# Altium PCB ee453_pcb_Schulz.PcbDoc (part 1 of 2)
Units mil, origin at the board's own origin, x right, y up, seen from the top; angles counter-clockwise.
Board outline 6000 x 5000 mil, 4 copper layers (Top Layer, PWR, GND, Bottom Layer); 112 components, 58 nets, 388 pads, 33 vias.
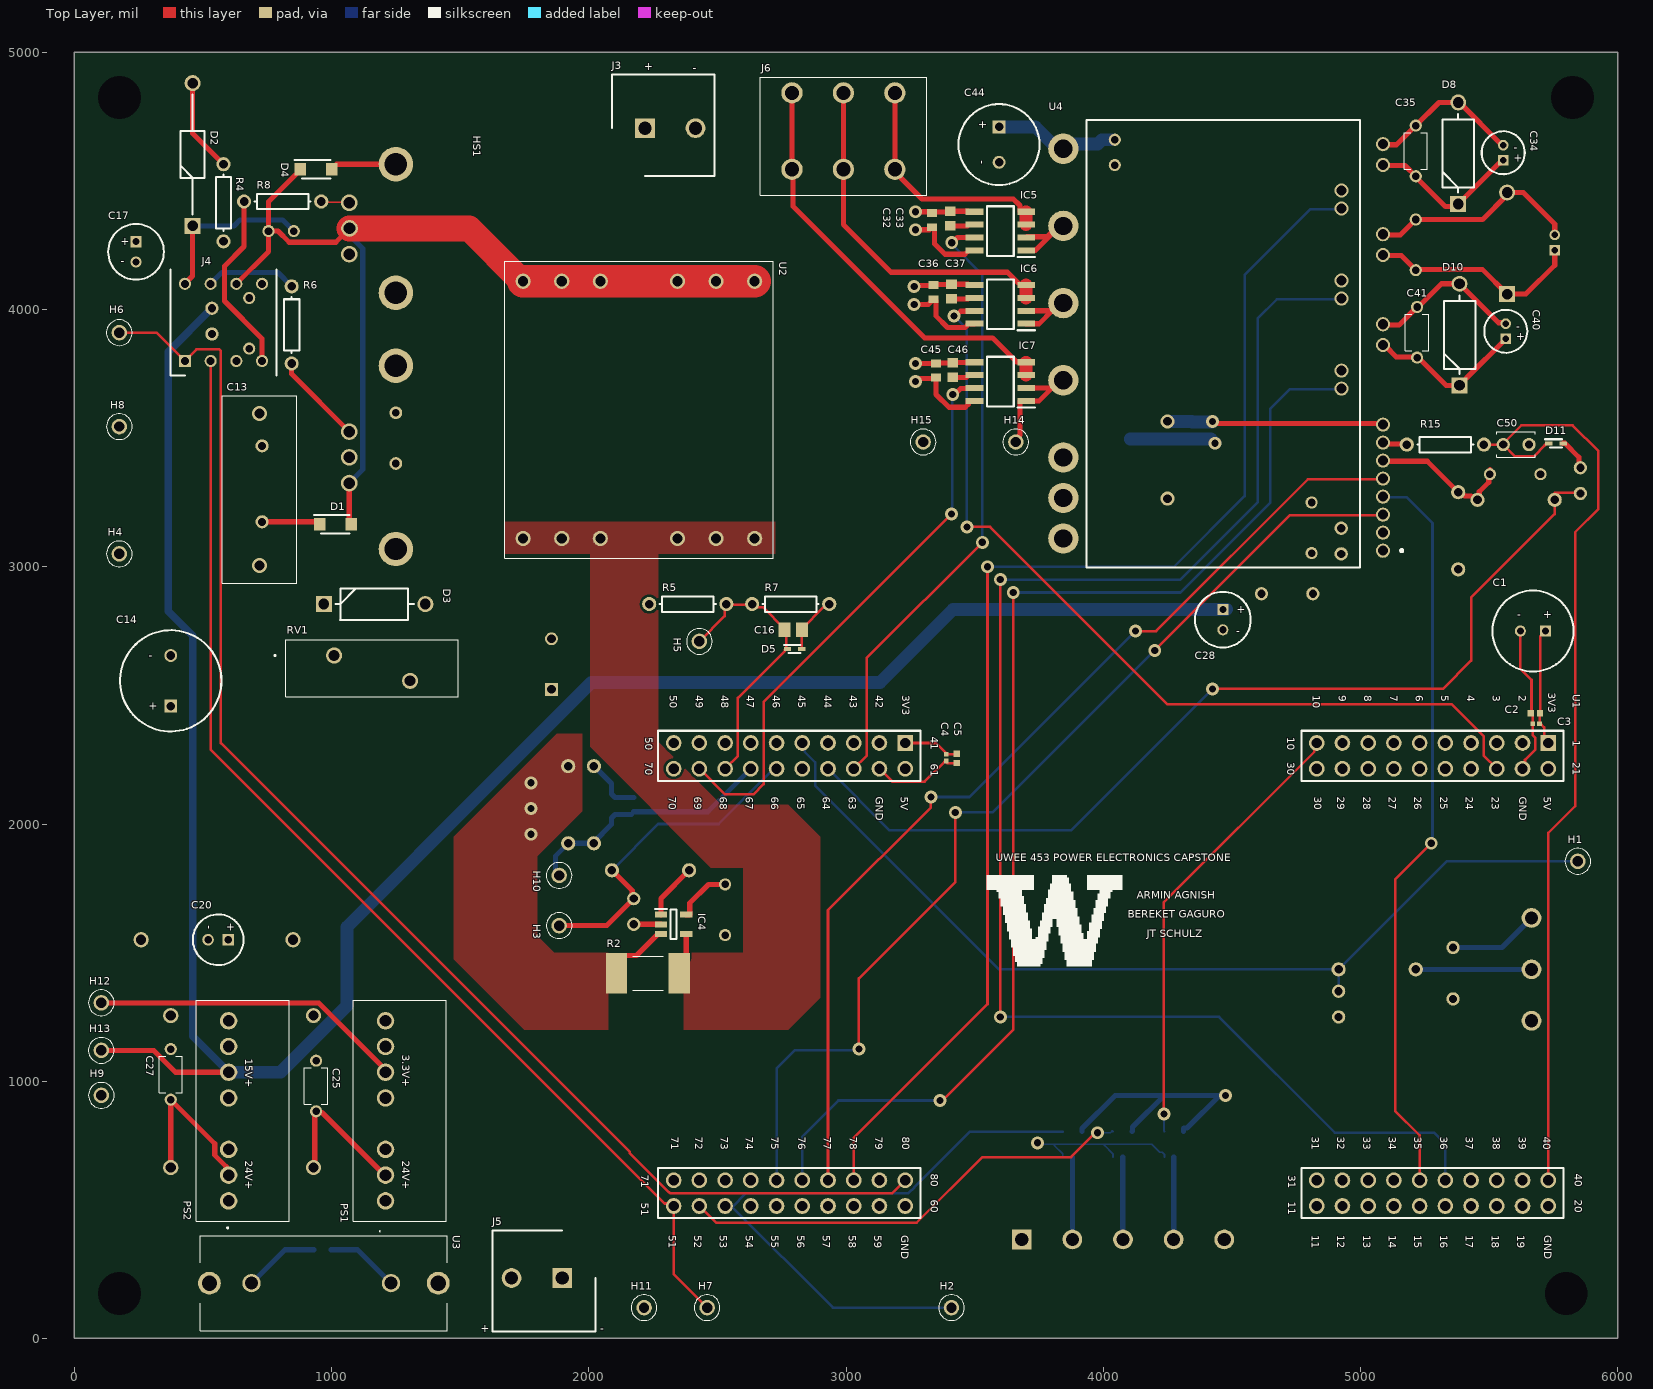
[diagram p0: Top Layer view]
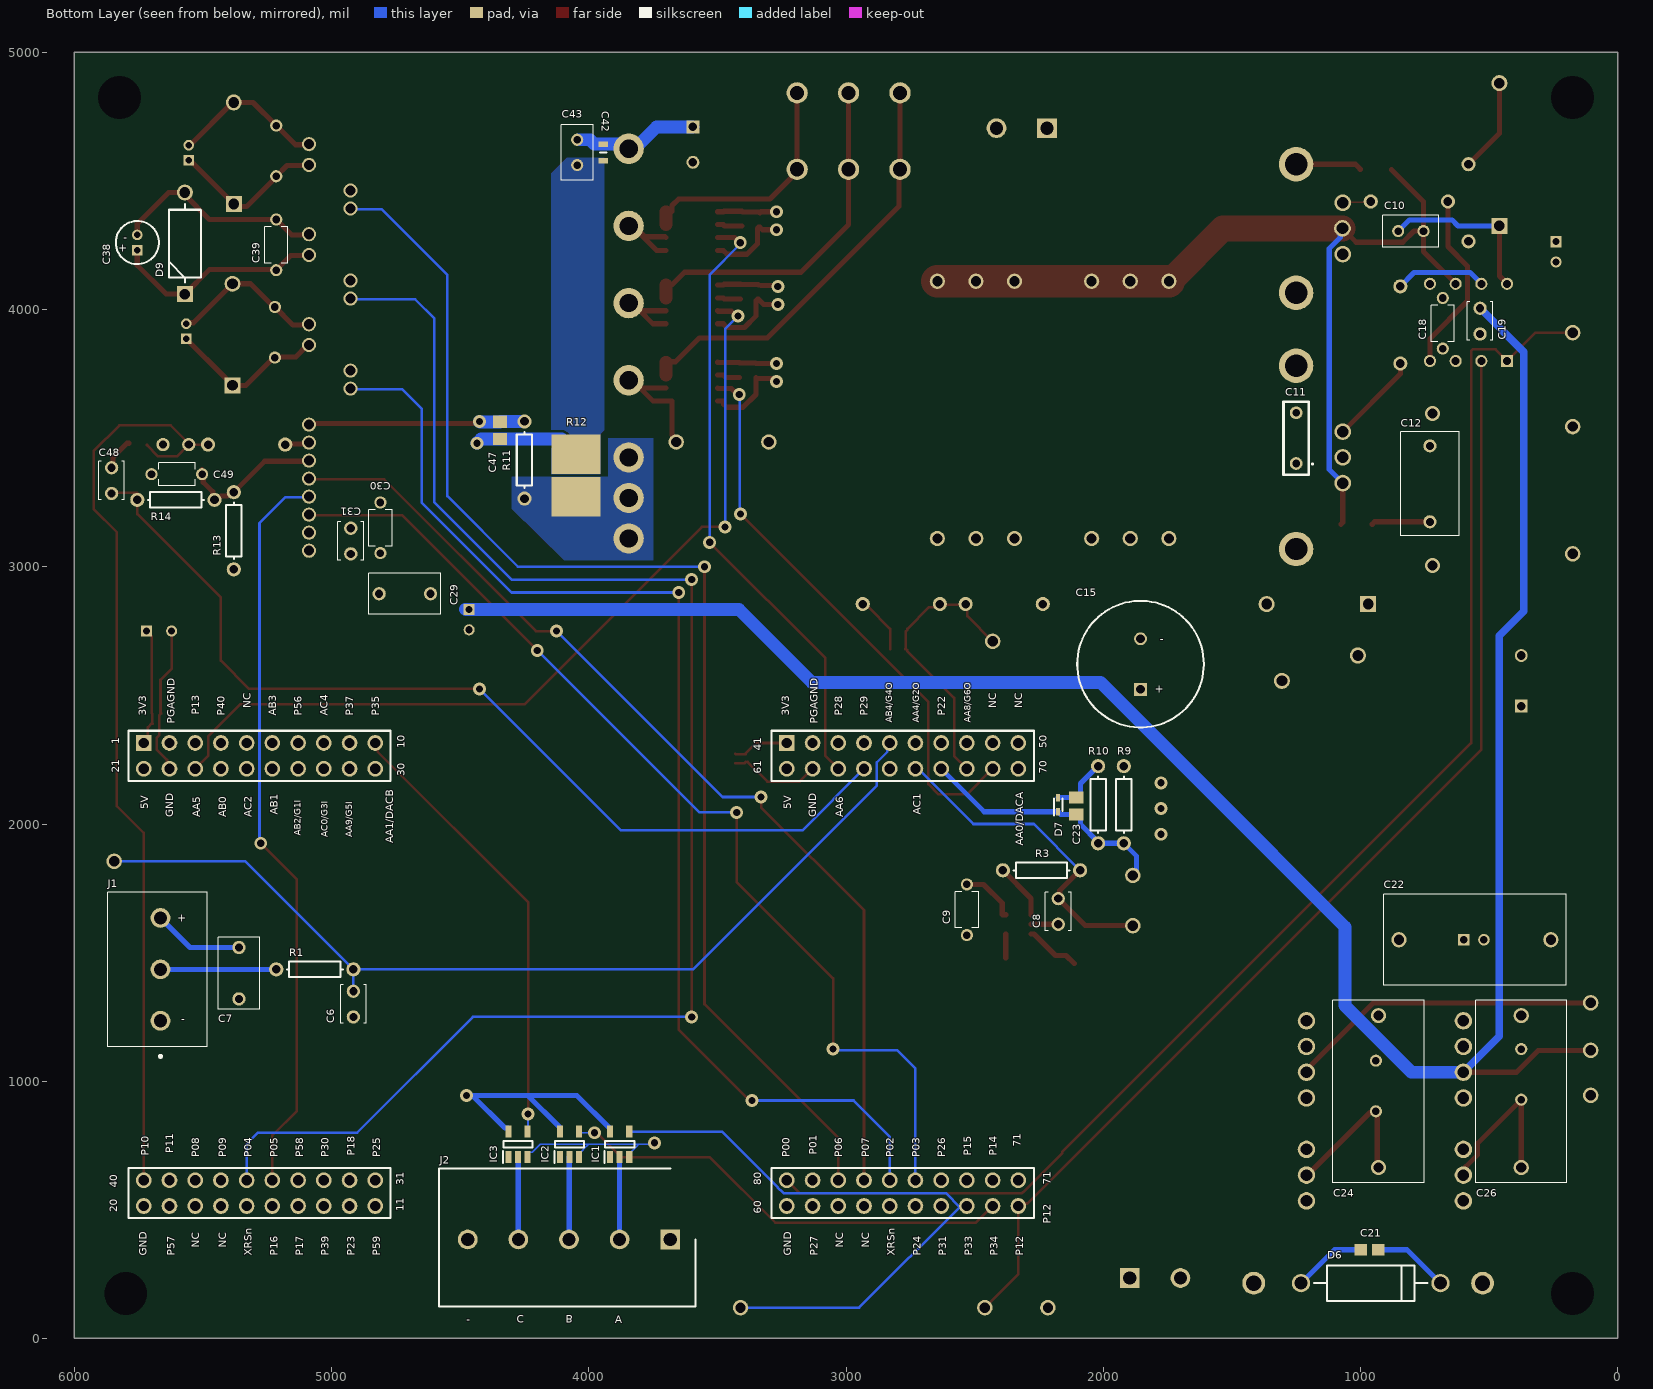
[diagram p1: Bottom Layer view, seen from below]
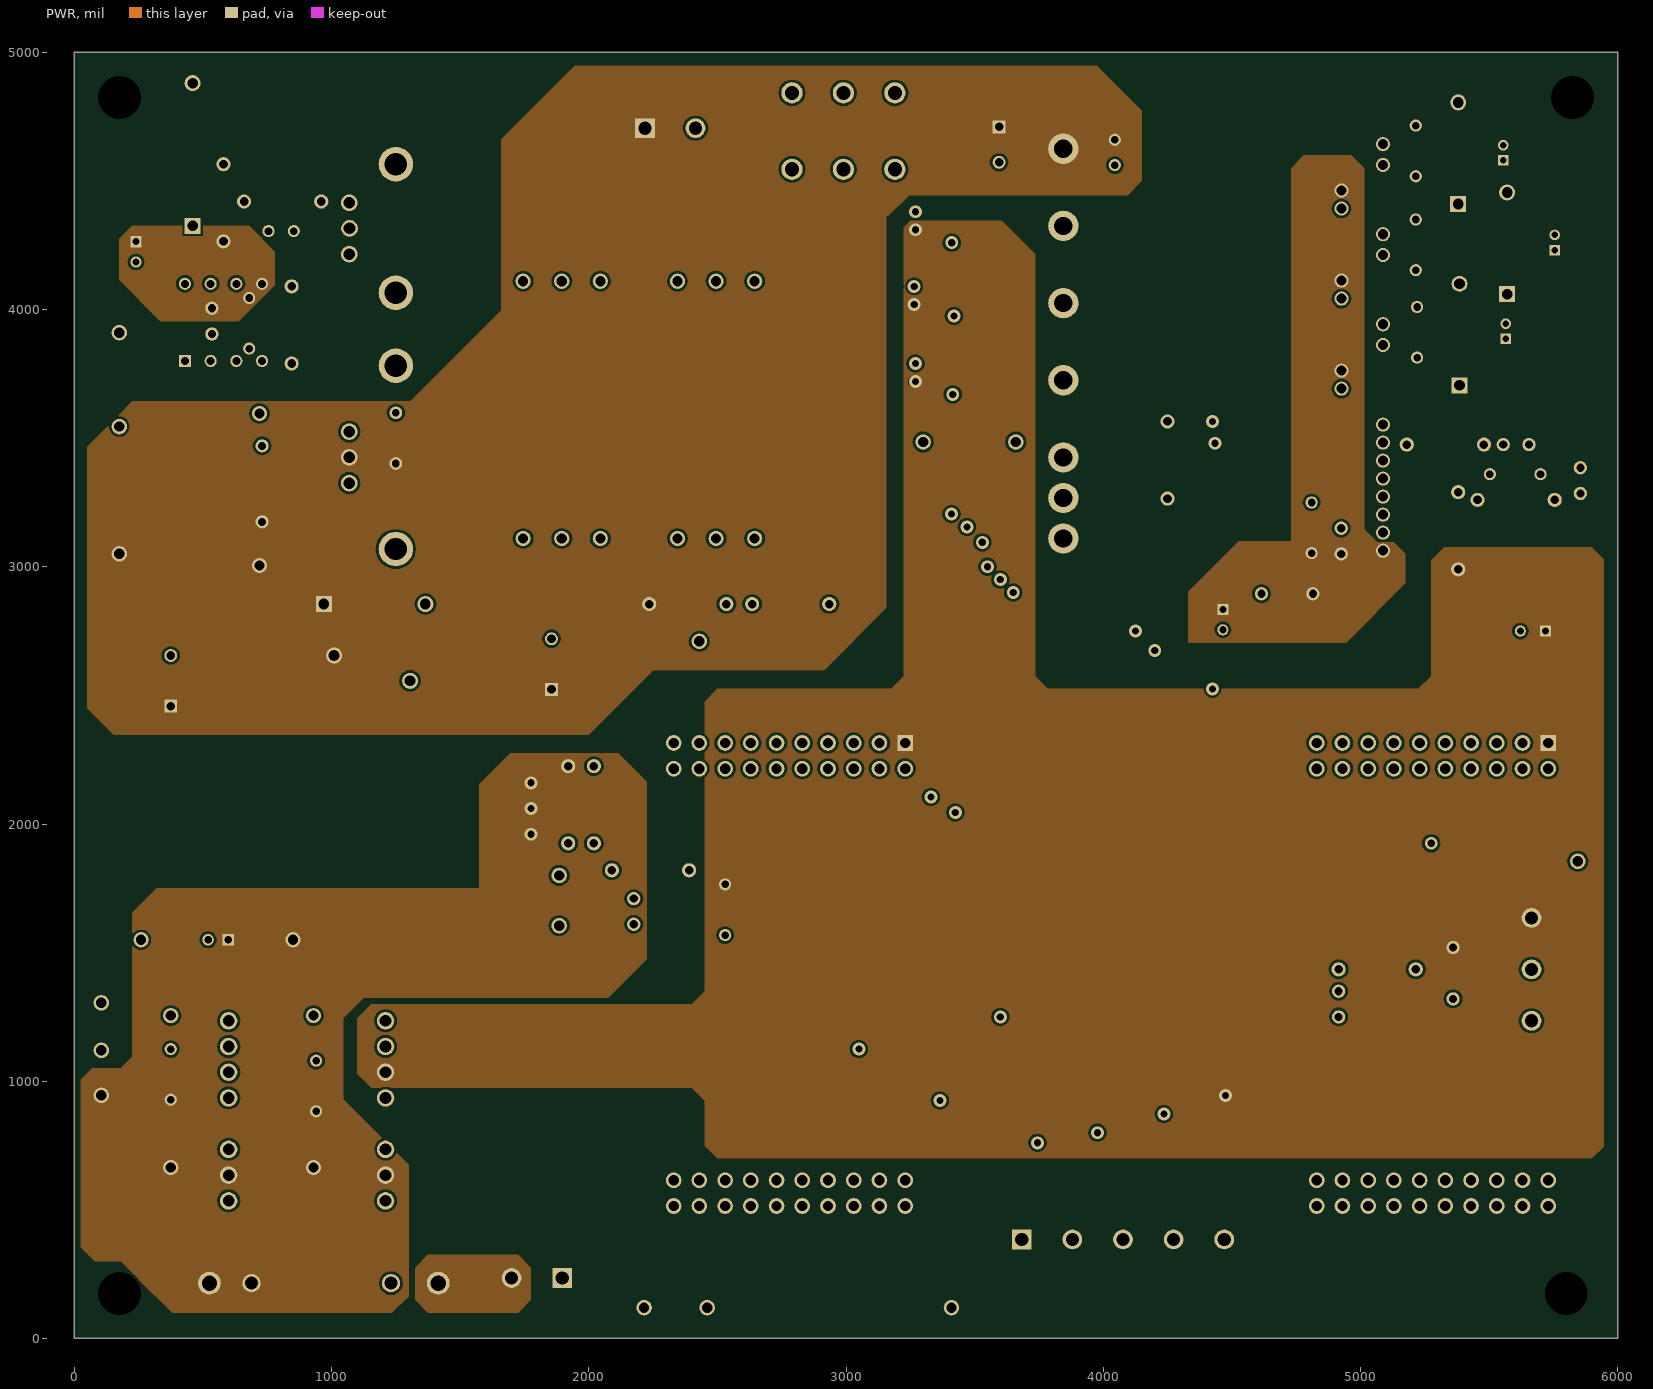
[diagram p2: PWR]
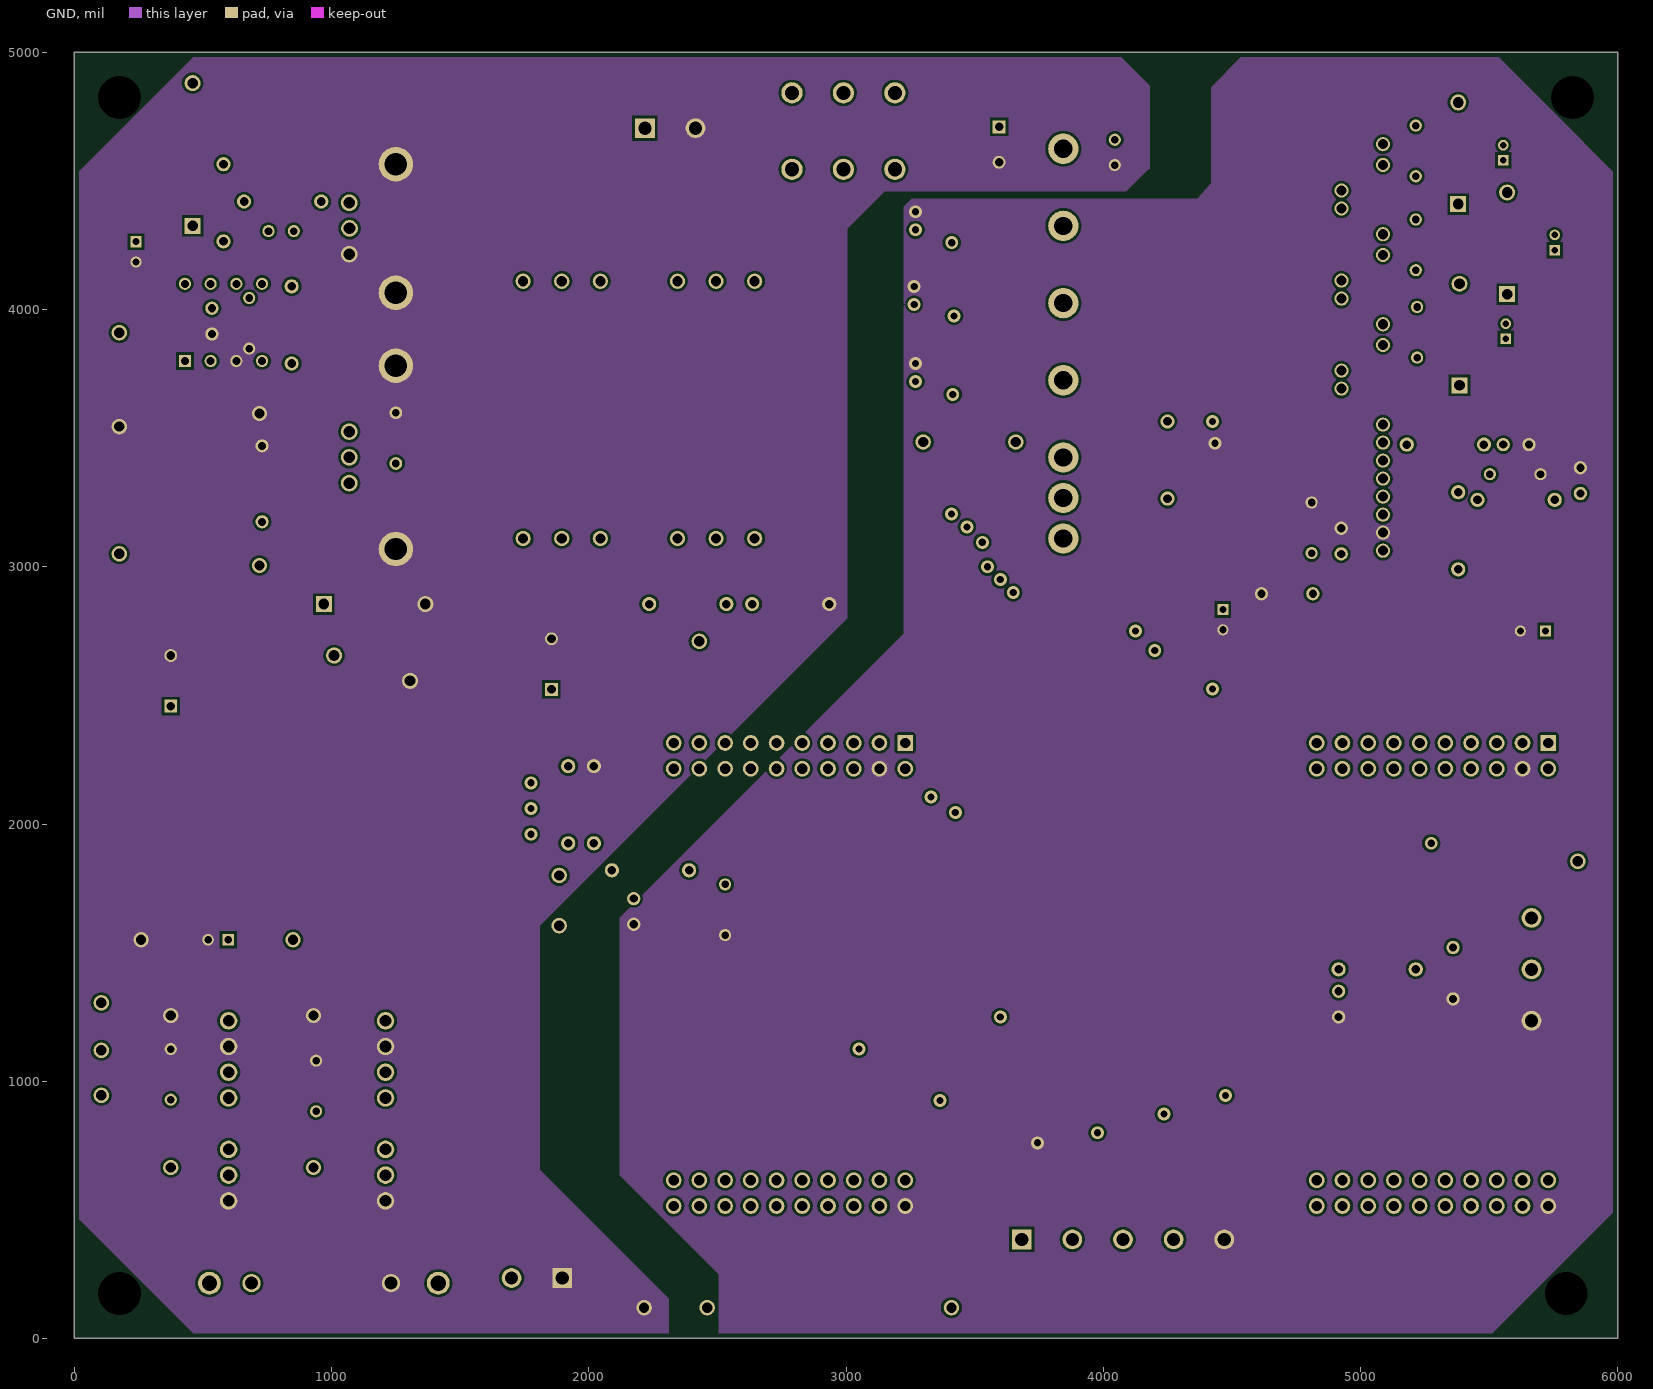
[diagram p3: GND]

## Layer stack, top to bottom
Top Solder: solder mask 0.4, Solder Resist, Dk 3.5
Top Layer: signal copper 1.4
Dielectric 1: dielectric 12.6, FR-4, Dk 4.8
PWR: signal copper 1.4
Dielectric 2: dielectric 12.6, FR-4, Dk 4.8
GND: signal copper 1.4
Dielectric 3: dielectric 12.6, FR-4, Dk 4.8
Bottom Layer: signal copper 1.4
Bottom Solder: solder mask 0.4, Solder Resist, Dk 3.5

## Board outline
0,0 6000,0 6000,5000 0,5000

## Design rules (kind name [scope] priority, off if disabled: settings)
Clearance [All] p1: gap=10 ignorepadtopadclearanceinfootprint=TRUE
Height [All] p1: minheight=0 maxheight=2000 prefheight=500
HoleSize [All] p1: absolutevalues=TRUE maxlimit=250 minlimit=5 maxpercent=80.000 minpercent=20.000
MinimumAnnularRing [All] p1: minimumring=5
PlaneConnect [All] p1: planeconnectstyle=Direct reliefexpansion=20 reliefentries=4 reliefconductorwidth=10 reliefairgap=10
PolygonConnect [All] p1: connectstyle=Direct reliefconductorwidth=10 reliefentries=4 polygonreliefangle="90 Angle" airgapwidth=10
RoutingVias [All] p1: holewidth=28 width=50 viastyle="Through Hole" minholewidth=28 minwidth=50 maxholewidth=28 maxwidth=50
SolderMaskExpansion [All] p1: expansion=4 istentingtop=FALSE
Width [All] p1: maxlimit=500 minlimit=7 preferedwidth=7
27 further rules are at their usual default settings.

## Classes and differential pairs
component class Power_Stage: C20 C21 C22 C23 C24 C25 C26 C27 D6 D7 H9 H10 H11 H12 H13 J5 PS1 PS2 R9 R10 U3
component class Drive_Module: C28 C29 C30 C31 C32 C33 C34 C35 C36 C37 C38 C39 C40 C41 C42 C43 C44 C45 C46 C47 C48 C49 C50 D8 D9 D10 D11 H14 IC5 IC6 IC7 J6 R11 R12 R13 R14 R15 U4
component class Boost_Stage: C8 C9 C10 C11 C12 C13 C14 C15 C16 C17 C18 C19 D1 D2 D3 D4 D5 H3 H4 H5 H6 H7 H8 HS1 IC4 J3 J4 R2 R3 R4 R5 R6 R7 R8 RV1 U2

## Components (designator, comment, footprint, x,y, rotation, side; value= is the part's Value field where it differs from the comment)
C1 "ECE-A1AKA220I" CAPPRD250W50D800H800 5720,2750 r180 top value=22uF
C2 "CC0402KRX7R6BB104" CAPC1005X55N 5680,2430.16 r180 top value=0.1uF
C3 "GRM033R71A103KA01D" CAPC0603X33N 5682.99,2390.16 r180 top value=0.01uF
C4 "GRM033R71A103KA01D" CAPC0603X33N 3390,2257.99 r270 top value=0.01uF
C5 "CC0402KRX7R6BB104" CAPC1005X55N 3430,2255 r270 top value=0.1uF
C6 "C315C103K5R5TA7990" C315C103K5R5TA7990 4915,1350 r270 bottom value=0.01uF
C7 "C330C105K5R5TA" C330C105K5R5TA 5360,1420 r270 bottom value=1uF
C8 "C315C103K5R5TA7990" C315C103K5R5TA7990 2175,1710 r270 bottom value=0.01uF
C9 "K104K10X7RF5UH5" K104K10X7RF5UH5 2530,1765 r270 bottom value=0.1uF
C10 "RDER72A105K2M1H03A" RCE5C1H104J2A2H03B 853.43,4305 r180 bottom value=1uF
C11 "R82EC2100DQ50J" R82(7.2X2.5) 1250,3500 r90 bottom value=0.01uF
C12 "ECQ-E2104JF" ECQE2104JF 730,3174.72 r90 bottom value=0.1uF
C13 "ECQ-E2105KF" ECQE2105KF 720,3005 r90 top value=1uF
C14 "EEU-FR2A101" CAPPRD500W65D1000H2200 375,2458.15 r90 top value=100uF
C15 "EEU-FS2A221" CAPPRD500W65D1250H2700 1855,2523.15 r90 bottom value=220uF
C16 "1nF" CAPC2013X95X45NL10T25 2795,2755 r180 top
C17 "UPW1E220MDD" CAPPRD200W50D550H1250 240,4263.74 r270 top value=22uF
C18 "K104K10X7RF5UH5" K104K10X7RF5UH5 680,4045 r270 bottom value=0.1uF
C19 "C315C103K5R5TA7990" C315C103K5R5TA7990 535,4005 r270 bottom value=0.01uF
C20 "27uF" CAPPRD200W55D500H1250 598.74,1550 r180 top
C21 "VC060326A580RP" CAPC1608X90X35ML15T15 965,345 r180 bottom
C22 "10uF" MKS4B051004J00KSSD 850.55,1550 r180 bottom
C23 "1nF" CAPC2013X95X45NL10T25 2105,2070 r270 bottom
C24 "MKS4B051004J00KSSD" MKS4B051004J00KSSD 930,664.45 r90 bottom value=10uF
C25 "K104K10X7RF5UH5" K104K10X7RF5UH5 940,883.15 r90 top value=0.1uF
C26 "MKS4B051004J00KSSD" MKS4B051004J00KSSD 375,664.45 r90 bottom value=10uF
C27 "K104K10X7RF5UH5" K104K10X7RF5UH5 375,928.15 r90 top value=0.1uF
C28 "UPW1E220MDD" CAPPRD200W50D550H1250 4465,2833.74 r270 top value=22uF
C29 "C330C105K5R5TA" C330C105K5R5TA 4715,2895 r180 bottom value=1uF
C30 "K104K10X7RF5UH5" K104K10X7RF5UH5 4810,3053.15 r90 bottom value=0.1uF
C31 "C315C103K5R5TA7990" C315C103K5R5TA7990 4925,3050 r90 bottom value=0.01uF
C32 "C0603C104K5RAC3121" CAPC1608X95N 3335,4347.56 r90 top value=0.1uF
C33 "GRM188R71H472KA01D" CAPC1608X90X35ML10T15 3405,4353.54 r90 top value=4.7nF
C34 "6.8uF" CAPPRD150W45D425H1250 5555,4580 r90 top
C35 "K104K10X7RF5UH5" K104K10X7RF5UH5 5215,4518.15 r90 top value=0.1uF
C36 "C0603C104K5RAC3121" CAPC1608X95N 3340,4067.56 r90 top value=0.1uF
C37 "GRM188R71H472KA01D" CAPC1608X90X35ML10T15 3410,4070 r90 top value=4.7nF
C38 "6.8uF" CAPPRD150W45D425H1250 5755,4230.94 r90 bottom
C39 "K104K10X7RF5UH5" K104K10X7RF5UH5 5215,4153.15 r90 bottom value=0.1uF
C40 "6.8uF" CAPPRD150W45D425H1250 5565,3885.94 r90 top
C41 "K104K10X7RF5UH5" K104K10X7RF5UH5 5220,3813.15 r90 top value=0.1uF
C42 "GRM188R72A104MA35D" CAPC1608X90N 3943.62,4610.79 r270 bottom value=0.1uF
C43 "RDER72A105K2M1H03A" RCE5C1H104J2A2H03B 4045,4660 r270 bottom value=1uF
C44 "EEU-FS2A470" CAPPRD350W65D800H1650 3595,4710 r270 top value=47uF
C45 "C0603C104K5RAC3121" CAPC1608X95N 3350,3762.56 r90 top value=0.1uF
C46 "GRM188R71H472KA01D" CAPC1608X90X35ML10T15 3415,3765 r90 top value=4.7nF
C47 "1nF" CAPC2013X95X45NL10T25 4345,3530 r270 bottom
C48 "C315C103K5R5TA7990" C315C103K5R5TA7990 5855,3285 r90 bottom value=0.01uF
C49 "K104K10X7RF5UH5" K104K10X7RF5UH5 5503.15,3360 r0 bottom value=0.1uF
C50 "C315C103K5R5TA7990" C315C103K5R5TA7990 5555,3475 r0 top value=0.01uF
D1 "S310FA" SODFL3618X143N 1015,3165 r0 top
D2 "1N4003" DIOAD1413W86L463D238 460,4325 r90 top
D3 "P6KE91A-E3_54" DIOAD1910W86L670D310 969.55,2855 r0 top
D4 "S310FA" SODFL3618X143N 940,4545 r0 top
D5 "BZX584C3V3-G3-08" SODFL1608X75N 2800,2680 r0 top
D6 "P6KE47A" ONSC-SURMETIC40-2-017AA-01 960,215 r0 bottom
D7 "BZX584C3V3-G3-08" SODFL1608X75N 2175,2075 r90 bottom
D8 "P6KE91A-E3_54" DIOAD1910W86L670D310 5380,4409.55 r90 top
D9 "P6KE91A-E3_54" DIOAD1910W86L670D310 5570,4059.55 r90 bottom
D10 "P6KE91A-E3_54" DIOAD1910W86L670D310 5385,3704.55 r90 top
D11 "BZX584C3V3-G3-08" SODFL1608X75N 5760,3480 r0 top
H1 "5003" 5003 5845,1855 r0 top
H2 "5003" 5003 3410,120 r0 top
H3 "5003" 5003 1885,1605 r270 top
H4 "5003" 5003 175,3050 r0 top
H5 "5003" 5003 2430,2710 r90 top
H6 "5003" 5003 175,3910 r90 top
H7 "5003" 5003 2460,120 r0 top
H8 "5003" 5003 175,3545 r0 top
H9 "5003" 5003 105,945 r0 top
H10 "5003" 5003 1885,1800 r0 top
H11 "5003" 5003 2215,120 r0 top
H12 "5003" 5003 105,1305 r0 top
H13 "5003" 5003 105,1120 r90 top
H14 "5003" 5003 3660,3485 r90 top
H15 "5003" 5003 3300,3485 r0 top
HS1 "Dual Heatsink" MOSFETsHeatsink 1250,3425.24 r0 top
IC1 "SN74LV1T34DBVRG4" SOT95P280X145-5N 3880,755 r90 bottom
IC2 "SN74LV1T34DBVRG4" SOT95P280X145-5N 4075,755 r90 bottom
IC3 "SN74LV1T34DBVRG4" SOT95P280X145-5N 4275,755 r90 bottom
IC4 "INA194AIDBVR" SOT95P280X145-5N 2330,1610 r0 top
IC5 "ACS725LLCTR-20AB-T" SOT127P600X175-8N 3600,4305 r180 top
IC6 "ACS725LLCTR-20AB-T" SOT127P600X175-8N 3600,4020 r180 top
IC7 "ACS725LLCTR-20AB-T" SOT127P600X175-8N 3600,3720 r180 top
J1 "1985917" 1985917 5665,1235 r90 bottom
J2 "1733606" SHDR5W110P0X500_1X5_2532X7360X1530P 3683.15,385 r0 bottom
J3 "1985881" SHDR2W110P0X500_1X2_1000X985X1390P 2218.15,4705 r0 top
J4 "DILB8P-223TLF" DIPS762W60P254L1016H525Q8N 430,3800 r90 top
J5 "1985881" SHDR2W110P0X500_1X2_1000X985X1390P 1896.85,235 r180 top
J6 "1730515" 1730515 2790,4545 r0 top
PS1 "RS3-243.3S" RS32433S 1210,535 r90 top
PS2 "RS3-2415S" RS32415S 600,535 r90 top
R1 "Res1" AXIAL-0.3 5065,1435 r0 bottom value=1.5K
R2 "5m" CRE2512FZR005E3 2230,1420 r0 top
R3 "Res1" AXIAL-0.3 2240,1820 r180 bottom value=1.5K
R4 "Res1" AXIAL-0.3 580,4415 r270 top value=10
R5 "Res1" AXIAL-0.3 2385,2855 r180 top value=80K
R6 "Res1" AXIAL-0.3 845,3940 r270 top value=10
R7 "Res1" AXIAL-0.3 2785,2855 r180 top value=5K
R8 "Res1" AXIAL-0.3 810,4420 r180 top value=10
R9 "Res1" AXIAL-0.3 1920,2075 r90 bottom value=50K
R10 "Res1" AXIAL-0.3 2020,2075 r270 bottom value=5K
R11 "Res1" AXIAL-0.3 4250,3415 r270 bottom value=1.5K
R12 "WSHP2818R0500FEA" RESC7146X175N 4050,3355 r90 bottom value=25m
R13 "Res1" AXIAL-0.3 5380,3140 r270 bottom value=4.7K
R14 "Res1" AXIAL-0.3 5605,3260 r180 bottom value=1.5K
R15 "Res1" AXIAL-0.3 5330,3475 r0 top value=1.5K
RV1 "V68ZS10P" V68ZS10P 1010,2655 r0 top
U1 "C2000" C2000 4030,1415 r0 top
U2 "B65878E1012D001" B65878E1012D001 2195,3610 r0 top
U3 "0PTF0078P" 0PTF0078P 970,215 r180 top
U4 "FNB34060T" FNB34060T 4531.26,3717.52 r270 top

## Footprints (in the part's own frame and the unit in brackets; to place one, negate y for a bottom-side part, rotate by r counter-clockwise, add the part's x,y. Pads: shape width x height; smd on the part's side, far side on the other; paste and mask are expansions set on the pad)
0PTF0078P [mm]
  round 2.25 hole 1.5: 1(-11.3,0) 2(11.3,0)
  silkscreen extent -12.2,-4.7 12.2,4.7, body extent -12.2,-4.7 12.2,4.7, height 11.6
5003 [mm]
  round 1.53 hole 1.02: 1(0,0)
  silkscreen extent -1.27,-1.27 1.27,1.27, body extent -1.27,-1.27 1.27,1.27, height 4.67
1730515 [mm]
  round 2.1 hole 1.4: 1(0,0) 2(0,7.55) 3(5.08,0) 4(5.08,7.55) 5(10.16,0) 6(10.16,7.55)
  silkscreen extent -3.13,-2.55 13.29,9.07, body extent -3.13,-2.55 13.29,9.07, height 18.1
1985917 [mm]
  round 1.95 hole 1.3: 1(0,0) 2(5.08,0) 3(10.16,0)
  silkscreen extent -3.62,-4.6 12.7,5.2, body extent -2.54,-4.6 12.7,5.2, height 14.05
AXIAL-0.3 [mm] "Axial Device, Thru-Hole; 2 Leads; 0.3 in Pin Spacing"
  round 1.4 hole 0.85: 1(-3.81,0) 2(3.81,0)
  silkscreen extent -2.77,-0.76 2.77,0.76
B65878E1012D001 [mm]
  round 1.5 hole 1: 1(-11.43,-12.7) 2(-7.62,-12.7) 3(-3.81,-12.7) 4(3.81,-12.7) 5(7.62,-12.7) 6(11.43,-12.7) 7(11.43,12.7) 8(7.62,12.7) 9(3.81,12.7) 10(-3.81,12.7) 11(-7.62,12.7) 12(-11.43,12.7)
  silkscreen extent -13.25,-14.65 13.25,14.65, body extent -13.25,-14.65 13.25,14.65, height 29.4
C315C103K5R5TA7990 [mm]
  round 1.316 hole 0.81: 1(0,0) 2(2.54,0)
  silkscreen extent -0.64,-1.27 3.18,1.27, body extent -0.63,-1.27 3.18,1.27, height 4.76
C330C105K5R5TA [mm]
  round 1.316 hole 0.81: 1(-2.54,0) 2(2.54,0)
  silkscreen extent -3.55,-2.03 3.55,2.03, body extent -3.55,-2.03 3.56,2.03, height 9.1
C2000 [mm]
  rrect6% 1.55x1.55 hole 1.02: 1(43.18,22.86) 41(-20.32,22.86)
  round 1.55 hole 1.02: 2(40.64,22.86) 3(38.1,22.86) 4(35.56,22.86) 5(33.02,22.86) 6(30.48,22.86) 7(27.94,22.86) 8(25.4,22.86) 9(22.86,22.86) 10(20.32,22.86) 11(20.32,-22.86) 12(22.86,-22.86) 13(25.4,-22.86) 14(27.94,-22.86) 15(30.48,-22.86) 16(33.02,-22.86) 17(35.56,-22.86) 18(38.1,-22.86) 19(40.64,-22.86) 20(43.18,-22.86) 21(43.18,20.32) 22(40.64,20.32) 23(38.1,20.32) 24(35.56,20.32) 25(33.02,20.32) 26(30.48,20.32) 27(27.94,20.32) 28(25.4,20.32) 29(22.86,20.32) 30(20.32,20.32) 31(20.32,-20.32) 32(22.86,-20.32) 33(25.4,-20.32) 34(27.94,-20.32) 35(30.48,-20.32) 36(33.02,-20.32) 37(35.56,-20.32) 38(38.1,-20.32) 39(40.64,-20.32) 40(43.18,-20.32) 42(-22.86,22.86) 43(-25.4,22.86) 44(-27.94,22.86) 45(-30.48,22.86) 46(-33.02,22.86) 47(-35.56,22.86) 48(-38.1,22.86) 49(-40.64,22.86) 50(-43.18,22.86) 51(-43.18,-22.86) 52(-40.64,-22.86) 53(-38.1,-22.86) 54(-35.56,-22.86) 55(-33.02,-22.86) 56(-30.48,-22.86) 57(-27.94,-22.86) 58(-25.4,-22.86) 59(-22.86,-22.86) 60(-20.32,-22.86) 61(-20.32,20.32) 62(-22.86,20.32) 63(-25.4,20.32) 64(-27.94,20.32) 65(-30.48,20.32) 66(-33.02,20.32) 67(-35.56,20.32) 68(-38.1,20.32) 69(-40.64,20.32) 70(-43.18,20.32) 71(-43.18,-20.32) 72(-40.64,-20.32) 73(-38.1,-20.32) 74(-35.56,-20.32) 75(-33.02,-20.32) 76(-30.48,-20.32) 77(-27.94,-20.32) 78(-25.4,-20.32) 79(-22.86,-20.32) 80(-20.32,-20.32)
  silkscreen extent -44.7,-24.07 44.7,24.07, body extent -44.7,-24.07 44.7,24.07, height 8.51
CAPC0603X33N [mm]
  rect 0.46x0.42 smd: 1(-0.33,0) 2(0.33,0)
  body extent -0.3,-0.15 0.3,0.15, height 0.33
CAPC1005X55N [mm]
  rect 0.6x0.62 smd: 1(-0.46,0) 2(0.46,0)
  body extent -0.5,-0.25 0.5,0.25, height 0.55
CAPC1608X90N [mm]
  rect 0.54x0.94 smd: 1(-0.8,0) 2(0.8,0)
  silkscreen extent 0,-0.3 0,0.3, body extent -0.8,-0.4 0.8,0.4, height 0.9
CAPC1608X90X35ML10T15 [mm] "Chip Capacitor, 2-Leads, Body 1.60x0.80mm, IPC Low Density"
  rect 0.95x1.05 smd: 1(-0.725,0) 2(0.725,0)
  body extent -0.85,-0.45 0.85,0.45, height 0.9
CAPC1608X90X35ML15T15 [mm] "Chip Capacitor, 2-Leads, Body 1.60x0.81mm, IPC Low Density"
  rect 1.25x1.1 smd: 1(-0.85,0) 2(0.85,0)
  body extent -0.88,-0.48 0.87,0.48, height 0.9
CAPC1608X95N [mm]
  rect 0.78x0.98 smd: 1(-0.7,0) 2(0.7,0)
  body extent -0.8,-0.4 0.8,0.4, height 0.95
CAPC2013X95X45NL10T25 [mm] "Chip Capacitor, 2-Leads, Body 2.00x1.25mm, IPC Medium Density"
  rect 1.2x1.4 smd: 1(-0.85,0) 2(0.85,0)
  body extent -1.05,-0.67 1.05,0.67, height 0.95
CAPPRD150W45D425H1250 [mm]
  rect 1.05x1.05 hole 0.65: 1(0,0)
  round 1.05 hole 0.65: 2(1.5,0)
  silkscreen extent -1.37,-2.12 2.87,2.12, body extent -1.5,-2.25 3,2.25, height 12.5
CAPPRD200W50D550H1250 [mm]
  rect 1.1x1.1 hole 0.7: 1(0,0)
  round 1.1 hole 0.7: 2(2,0)
  silkscreen extent -1.75,-2.75 3.75,2.75, body extent -1.75,-2.75 3.75,2.75, height 12.5
CAPPRD200W55D500H1250 [mm]
  rect 1.15x1.15 hole 0.75: 1(0,0)
  round 1.15 hole 0.75: 2(2,0)
  silkscreen extent -1.5,-2.5 3.5,2.5, body extent -1.75,-2.75 3.75,2.75, height 12.5
CAPPRD250W50D800H800 [mm]
  rect 1.1x1.1 hole 0.7: 1(0,0)
  round 1.1 hole 0.7: 2(2.5,0)
  silkscreen extent -2.75,-4 5.25,4, body extent -3,-4.25 5.5,4.25, height 8
CAPPRD350W65D800H1650 [mm]
  rect 1.275x1.275 hole 0.85: 1(0,0)
  round 1.275 hole 0.85: 2(3.5,0)
  silkscreen extent -2.25,-4 5.75,4, body extent -2.5,-4.25 6,4.25, height 16.5
CAPPRD500W65D1000H2200 [mm]
  rect 1.275x1.275 hole 0.85: 1(0,0)
  round 1.275 hole 0.85: 2(5,0)
  silkscreen extent -2.5,-5 7.5,5, body extent -2.75,-5.25 7.75,5.25, height 22
CAPPRD500W65D1250H2700 [mm]
  rect 1.275x1.275 hole 0.85: 1(0,0)
  round 1.275 hole 0.85: 2(5,0)
  silkscreen extent -3.75,-6.25 8.75,6.25, body extent -4,-6.5 9,6.5, height 27
CRE2512FZR005E3 [mm]
  rect 2.1x4 smd: 1(-3.1,0) 2(3.1,0)
  silkscreen extent -1.5,-1.68 1.5,1.68
DIOAD1413W86L463D238 [mm]
  rect 1.575x1.575 hole 1.05: 1(0,0)
  round 1.575 hole 1.05: 2(14.1,0)
  silkscreen extent 1.14,-1.19 12.96,1.19, body extent -0.43,-1.36 14.56,1.36, height 2.71
DIOAD1910W86L670D310 [mm]
  rect 1.575x1.575 hole 1.05: 1(0.011,0)
  round 1.575 hole 1.05: 2(10.044,0)
  silkscreen extent 1.15,-1.58 8.9,1.55, body extent -1.26,-1.79 11.31,1.78, height 0.25
DIPS762W60P254L1016H525Q8N [mm]
  rect 1.2x1.2 hole 0.8: 1(0,0)
  round 1.2 hole 0.8: 2(0,-2.54) 3(0,-5.08) 4(0,-7.62) 5(7.62,-7.62) 6(7.62,-5.08) 7(7.62,-2.54) 8(7.62,0)
  silkscreen extent -1.42,-9.04 9.04,1.42
ECQE2104JF [mm]
  round 1.3 hole 0.8: 1(0,0) 2(7.5,0)
  silkscreen extent -1.4,-2.9 8.9,2.9, body extent -1.4,-2.9 8.9,2.9, height 13.5
ECQE2105KF [mm]
  round 1.5 hole 1: 1(0,0) 2(15,0)
  silkscreen extent -1.75,-3.7 16.75,3.7, body extent -1.75,-3.7 16.75,3.7, height 15.1
FNB34060T [mm]
  round 1.4 hole 1 paste-1000: 1(16.637,14.129) 2(14.859,14.129) 3(13.081,14.129) 4(11.303,14.129) 5(9.525,14.129) 6(7.747,14.129) 7(5.969,14.129) 8(4.191,14.129) 9(0.635,10.029) 10(-1.143,10.029) 11(-3.674,14.129) 12(-5.724,14.129) 13(-8.255,10.029) 14(-10.033,10.029) 15(-12.564,14.129) 16(-14.614,14.129) 17(-17.145,10.029) 18(-18.923,10.029) 19(-21.454,14.129) 20(-23.504,14.129)
  round 3 hole 1.8 paste-1000: 21(15.43,-17.431) 22(11.43,-17.431) 23(7.43,-17.431) 24(-0.19,-17.431) 25(-7.81,-17.431) 26(-15.43,-17.431) 27(-23.05,-17.431)
  silkscreen extent -25.91,-15.15 18.29,16.1, body extent -25.77,-17.75 18.16,14.73, height 5.61
K104K10X7RF5UH5 [mm]
  round 1.2 hole 0.75: 1(0,0) 2(5,0)
  silkscreen extent 0.7,-1.15 4.3,1.15, body extent -0.27,-1.15 5.28,1.15, height 6.3
MKS4B051004J00KSSD [mm]
  round 1.5 hole 1: 1(0,0) 2(15,0)
  silkscreen extent -1.5,-4.5 16.5,4.5, body extent -1.5,-4.5 16.5,4.5, height 16.1
MOSFETsHeatsink [mil]
  round 65 hole 45: 1(-181.1,100) 2(-181.1,0) 3(-181.1,-100) 4(-181.1,989.6) 5(-180,890) 6(-181.1,790.08)
  round 133.86 hole 86.61: 7(0,-356.3) 8(0,356.3) 9(0,639.76) 10(0,1139.76)
ONSC-SURMETIC40-2-017AA-01 [mm] "AXIAL, 2-Leads, Diameter 3.49mm"
  round 1.8 hole 1.3: 1(-6.887,0) 2(6.887,0)
  silkscreen extent -5.59,-1.75 5.59,1.75
R82(7.2X2.5) [mm]
  round 1.26 hole 0.76: 1(-2.5,0) 2(2.5,0)
  silkscreen extent -3.6,-1.64 3.6,1.25, body extent -3.7,-1.25 3.7,1.35, height 3.05
RCE5C1H104J2A2H03B [mm]
  round 1.2 hole 0.75: 1(0,0) 2(2.5,0)
  silkscreen extent -1.5,-1.58 4,1.58, body extent -1.5,-1.58 4,1.57, height 5.6
RESC7146X175N [mm]
  rect 3.9x4.85 smd: 1(-2.1,0) 2(2.1,0)
  body extent -3.55,-2.3 3.55,2.3, height 1.75
RS32415S [mm]
  round 1.725 hole 1.15: 1(0,0) 2(2.54,0) 3(5.08,0) 5(10.16,0) 6(12.7,0) 7(15.24,0) 8(17.78,0)
  silkscreen extent -2.71,-6 19.79,3.2, body extent -2.01,-6 19.79,3.2, height 11.45
RS32433S [mm]
  round 1.725 hole 1.15: 1(0,0) 2(2.54,0) 3(5.08,0) 5(10.16,0) 6(12.7,0) 7(15.24,0) 8(17.78,0)
  silkscreen extent -3.05,-6 19.79,3.2, body extent -2.01,-6 19.79,3.2, height 11.45
SHDR2W110P0X500_1X2_1000X985X1390P [mm]
  rect 1.95x1.95 hole 1.3: 1(0,0)
  round 1.95 hole 1.3: 2(5,0)
  silkscreen extent -3.27,-4.7 6.88,5.3, body extent -2.45,-5.36 8.29,4.44, height 13.8
SHDR5W110P0X500_1X5_2532X7360X1530P [mm]
  rect 1.95x1.95 hole 1.3: 1(0,0)
  round 1.95 hole 1.3: 2(5,0) 3(10,0) 4(15,0) 5(20,0)
  silkscreen extent -2.5,-7 22.82,6.6, body extent -3.55,-6.54 22.6,6.86, height 15.3
SODFL1608X75N [mm]
  rect 0.73x0.4 smd: 1(-0.7,0) 2(0.7,0)
  silkscreen extent -1.06,-0.4 0.6,0.4, body extent -0.8,-0.4 0.8,0.4, height 0.75
SODFL3618X143N [mm]
  rect 1.12x1.22 smd: 1(-1.55,0) 2(1.55,0)
  silkscreen extent -2.11,-0.9 1.4,0.9, body extent -1.8,-0.9 1.8,0.9, height 1.43
SOT95P280X145-5N [mm]
  rect 1.2x0.6 smd: 1(-1.25,0.95) 2(-1.25,0) 3(-1.25,-0.95) 4(1.25,-0.95) 5(1.25,0.95)
  silkscreen extent -1.85,-1.45 0.3,1.5, body extent -1.4,-1.45 1.4,1.45, height 1.45
SOT127P600X175-8N [mm]
  rect 1.75x0.6 smd: 1(-2.55,1.905) 2(-2.55,0.635) 3(-2.55,-0.635) 4(-2.55,-1.905) 5(2.55,-1.905) 6(2.55,-0.635) 7(2.55,0.635) 8(2.55,1.905)
  silkscreen extent -3.42,-2.45 1.33,2.56, body extent -3,-2.45 3,2.45, height 1.75
V68ZS10P [mm]
  round 1.59 hole 1.06: 1(0,0) 2(7.5,-2.5)
  silkscreen extent -5.9,-4.05 12.25,1.55, body extent -4.75,-4.05 12.25,1.55, height 20.1

## Part data
C1: "Capacitor Polarised 10V", Manufacturer_Name=Panasonic, Mouser Part Number=667-ECE-A1AKA220I, Datasheet Link=https://componentsearchengine.com/Datasheets/1/ECE-A1AKA220I.pdf, Height=8mm, Manufacturer_Part_Number=ECE-A1AKA220I, Mouser Price/Stock=https://www.mouser.com/Search/Refine.aspx?Keyword=667-ECE-A1AKA220I
C2 C5: "Capacitor 10V", Manufacturer_Name="YAGEO (PHYCOMP)", Mouser Part Number=603-CC402KRX7R6BB104, RS Part Number=6698690, Datasheet Link=https://www.mouser.com/datasheet/2/447/UPY-GPHC_X7R_6.3V-to-50V_18-1154002.pdf, Height=0.55mm, Manufacturer_Part_Number=CC0402KRX7R6BB104, Mouser Price/Stock=https://www.mouser.com/Search/Refine.aspx?Keyword=603-CC402KRX7R6BB104, RS Price/Stock=http://uk.rs-online.com/web/p/products/6698690
C3 C4: "Capacitor 10V", Manufacturer_Name="Murata Electronics", Mouser Part Number=81-GRM033R71A103KA1D, RS Part Number=7235143P, Datasheet Link=https://psearch.en.murata.com/capacitor/product/GRM033R71A103KA01%23.html, Height=0.33mm, Manufacturer_Part_Number=GRM033R71A103KA01D, Mouser Price/Stock=https://www.mouser.com/Search/Refine.aspx?Keyword=81-GRM033R71A103KA1D, RS Price/Stock=http://uk.rs-online.com/web/p/products/7235143P
C6 C8 C19 C31 C48 C50: "Capacitor 50V", Manufacturer_Name=Kemet, Mouser Part Number=N/A, Datasheet Link=https://api.kemet.com/component-edge/download/datasheet/C315C103K5R5TA.pdf, Height=4.66mm, Manufacturer_Part_Number=C315C103K5R5TA7990, Mouser Price/Stock=https://www.mouser.com/Search/Refine.aspx?Keyword=N%2FA
C7 C29: "Capacitor 50V", Manufacturer_Name=Kemet, Mouser Part Number=80-C330C105K5R, RS Part Number=8704038, Datasheet Link=http://uk.rs-online.com/web/p/products/8704038, Height=9mm, Manufacturer_Part_Number=C330C105K5R5TA, Mouser Price/Stock=https://www.mouser.com/Search/Refine.aspx?Keyword=80-C330C105K5R, RS Price/Stock=http://uk.rs-online.com/web/p/products/8704038
C9 C18 C25 C27 C30 C35 C39 C41 C49: "Capacitor 50V", Manufacturer_Name=Vishay, Mouser Part Number=594-K104K10X7RF5UH5, Datasheet Link=https://www.vishay.com/docs/45171/kseries.pdf, Height=6.2mm, Manufacturer_Part_Number=K104K10X7RF5UH5, Mouser Price/Stock=https://www.mouser.com/Search/Refine.aspx?Keyword=594-K104K10X7RF5UH5
C10 C43: "Capacitor", Manufacturer_Name="Murata Electronics", Mouser Part Number=81-RDER72A105K2M1H3A, RS Part Number=1504005, Datasheet Link=https://psearch.en.murata.com/capacitor/product/RDER72A105K2M1H03A.html, Height=5.5mm, Manufacturer_Part_Number=RDER72A105K2M1H03A, Mouser Price/Stock=https://www.mouser.com/Search/Refine.aspx?Keyword=81-RDER72A105K2M1H3A, RS Price/Stock=http://uk.rs-online.com/web/p/products/1504005
C11: "Capacitor 100V", Manufacturer_Name=Kemet, Mouser Part Number=80-R82EC2100DQ50J, RS Part Number=3121431P, Allied Price/Stock=https://www.alliedelec.com/kemet-r82ec2100dq50j/70037796/, Allied_Number=70037796, Datasheet Link=http://docs-emea.rs-online.com/webdocs/1529/0900766b81529050.pdf, Manufacturer_Part_Number=R82EC2100DQ50J, Mouser Price/Stock=https://www.mouser.com/Search/Refine.aspx?Keyword=80-R82EC2100DQ50J, RS Price/Stock=http://uk.rs-online.com/web/p/products/3121431P
C12: "Capacitor 250V", Manufacturer_Name=Panasonic, Mouser Part Number=667-ECQ-E2104JF, Allied Price/Stock=https://www.alliedelec.com/panasonic-ecq-e2104jf/70260012/, Allied_Number=70260012, Datasheet Link=http://industrial.panasonic.com/www-cgi/jvcr13pz.cgi?E+PZ+4+ABD0023+ECQE2104JF+8+WW, Height=13.4mm, Manufacturer_Part_Number=ECQ-E2104JF, Mouser Price/Stock=https://www.mouser.com/Search/Refine.aspx?Keyword=667-ECQ-E2104JF
C13: "Capacitor 250V", Manufacturer_Name=Panasonic, Mouser Part Number=667-ECQ-E2105KF, Datasheet Link=https://industrial.panasonic.com/cdbs/www-data/pdf/RDI0000/ABD0000C179.pdf, Height=15mm, Manufacturer_Part_Number=ECQ-E2105KF, Mouser Price/Stock=https://www.mouser.com/Search/Refine.aspx?Keyword=667-ECQ-E2105KF
C14: "Capacitor Polarised 100V", Manufacturer_Name=Panasonic, Mouser Part Number=667-EEU-FR2A101, Datasheet Link=https://industrial.panasonic.com/cdbs/www-data/pdf/RDF0000/ABA0000C1259.pdf, Height=22mm, Manufacturer_Part_Number=EEU-FR2A101, Mouser Price/Stock=https://www.mouser.com/Search/Refine.aspx?Keyword=667-EEU-FR2A101
C15: "Capacitor Polarised 100V", Manufacturer_Name=Panasonic, Mouser Part Number=667-EEU-FS2A221, Datasheet Link=https://industrial.panasonic.com/cdbs/www-data/pdf/RDF0000/ABA0000C1255.pdf, Height=27mm, Manufacturer_Part_Number=EEU-FS2A221, Mouser Price/Stock=https://www.mouser.com/Search/Refine.aspx?Keyword=667-EEU-FS2A221
C16 C23: library part CMP-2007-00148-1, Manufacturer=Murata, Part Number=GRM2195C2A102JA01D
C17 C28: "Capacitor Polarised  25V", Manufacturer_Name=Nichicon, Mouser Part Number=647-UPW1E220MDD, RS Part Number=7152625P, Allied Price/Stock=https://www.alliedelec.com/nichicon-upw1e220mdd/70187288/, Allied_Number=70187288, Datasheet Link=http://nichicon-us.com/english/products/pdfs/e-upw.pdf, Height=12.5mm, Manufacturer_Part_Number=UPW1E220MDD, Mouser Price/Stock=https://www.mouser.com/Search/Refine.aspx?Keyword=647-UPW1E220MDD, RS Price/Stock=http://uk.rs-online.com/web/p/products/7152625P
C20: library part EEU-FS1H270B, "50V 27uF electrolytic cap EEU-FS1H270B", Manufacturer_Name=Panasonic, Mouser Part Number=667-EEU-FS1H270B, Datasheet Link=https://componentsearchengine.com/Datasheets/1/EEU-FS1H270B.pdf, Height=12.5mm, Manufacturer_Part_Number=EEU-FS1H270B, Mouser Price/Stock=https://www.mouser.com/Search/Refine.aspx?Keyword=667-EEU-FS1H270B
C21: library part CMP-2006-02022-1, Manufacturer="AVX Interconnect / Elco", Part Number=VC060326A580RP
C22: library part MKS4B051004J00KSSD, "MKS4B051004J00KSSD", Manufacturer_Name=WIMA, Mouser Part Number=505-MKS410/50/10, Datasheet Link=https://www.mouser.com/datasheet/2/440/e_WIMA_MKS_4-1139797.pdf, Height=16mm, Manufacturer_Part_Number=MKS4B051004J00KSSD, Mouser Price/Stock=https://www.mouser.com/Search/Refine.aspx?Keyword=505-MKS410%2F50%2F10
C24 C26: "Capacitor 50V", Manufacturer_Name=WIMA, Mouser Part Number=505-MKS410/50/10, Datasheet Link=https://www.mouser.com/datasheet/2/440/e_WIMA_MKS_4-1139797.pdf, Height=16mm, Manufacturer_Part_Number=MKS4B051004J00KSSD, Mouser Price/Stock=https://www.mouser.com/Search/Refine.aspx?Keyword=505-MKS410%2F50%2F10
C32 C36 C45: "Capacitor 50V", Manufacturer_Name=Kemet, Mouser Part Number=80-C603C104K5RAC3121, Datasheet Link=https://mouser.componentsearchengine.com/Datasheets/1/C0603C104K5RAC3121.pdf, Height=0.95mm, Manufacturer_Part_Number=C0603C104K5RAC3121, Mouser Price/Stock=https://www.mouser.com/Search/Refine.aspx?Keyword=80-C603C104K5RAC3121
C33 C37 C46: library part CMP-2006-02924-1, Manufacturer=Murata, Part Number=GRM188R71H472KA01D
C34 C38: library part UPW1J6R8MDD6, "Capacitor Polarised", Manufacturer_Name=Nichicon, RS Part Number=8515424, Allied Price/Stock=https://www.alliedelec.com/nichicon-upw1j6r8mdd6/70187297/, Allied_Number=70187297, Datasheet Link=http://nichicon-us.com/english/products/pdfs/e-upw.pdf, Height=12.5mm, Manufacturer_Part_Number=UPW1J6R8MDD6, RS Price/Stock=https://uk.rs-online.com/web/p/products/8515424
C40: library part UPW1J6R8MDD6, "UPW1J6R8MDD6", Manufacturer_Name=Nichicon, RS Part Number=8515424, Allied Price/Stock=https://www.alliedelec.com/nichicon-upw1j6r8mdd6/70187297/, Allied_Number=70187297, Datasheet Link=http://nichicon-us.com/english/products/pdfs/e-upw.pdf, Height=12.5mm, Manufacturer_Part_Number=UPW1J6R8MDD6, RS Price/Stock=https://uk.rs-online.com/web/p/products/8515424
C42: "Capacitor", Manufacturer_Name="Murata Electronics", Mouser Part Number=81-GRM188R72A104MA5D, Height=0.9mm, Manufacturer_Part_Number=GRM188R72A104MA35D, Mouser Price/Stock=https://www.mouser.com/Search/Refine.aspx?Keyword=81-GRM188R72A104MA5D
C44: "Capacitor Polarised", Manufacturer_Name=Panasonic, Mouser Part Number=667-EEU-FS2A470, Datasheet Link=https://componentsearchengine.com/Datasheets/1/EEU-FS2A470.pdf, Height=16.5mm, Manufacturer_Part_Number=EEU-FS2A470, Mouser Price/Stock=https://www.mouser.com/Search/Refine.aspx?Keyword=667-EEU-FS2A470
C47: library part CMP-2007-00148-1, "GRM2195C2A102JA01D", Manufacturer=Murata, Part Number=GRM2195C2A102JA01D
D1 D4: "Diode", Manufacturer_Name="ON Semiconductor", Mouser Part Number=512-S310FA, RS Part Number=1841470, Datasheet Link=https://eagle.componentsearchengine.com/Datasheets/2/S310FA.pdf, Height=1.43mm, Manufacturer_Part_Number=S310FA, Mouser Price/Stock=https://www.mouser.com/Search/Refine.aspx?Keyword=512-S310FA, RS Price/Stock=http://uk.rs-online.com/web/p/products/1841470
D2: "Diode", Manufacturer_Name="ON Semiconductor", Mouser Part Number=512-1N4003, RS Part Number=7596674P, Datasheet Link=http://docs-emea.rs-online.com/webdocs/10c0/0900766b810c07cd.pdf, Manufacturer_Part_Number=1N4003, Mouser Price/Stock=http://www.mouser.com/Search/ProductDetail.aspx?qs=PKwgOmPR8%252bn6tj%252bW%252bQZQFA%3d%3d, RS Price/Stock=http://uk.rs-online.com/web/p/products/7596674P
D3 D8 D9 D10: "TVS Diode (Uni-directional)", Manufacturer_Name=Vishay, Manufacturer_Part_Number=P6KE91A-E3/54, Datasheet Link=https://www.mouser.com/datasheet/2/427/p6ke-1767850.pdf
D5 D7 D11: "Diode", Manufacturer_Name=Vishay, Mouser Part Number=78-BZX584C3V3-G3-08, Datasheet Link=https://componentsearchengine.com/Datasheets/1/BZX584C3V3-G3-08.pdf, Height=0.75mm, Manufacturer_Part_Number=BZX584C3V3-G3-08, Mouser Price/Stock=https://www.mouser.com/Search/Refine.aspx?Keyword=78-BZX584C3V3-G3-08
D6: library part CMP-1061-00684-1, "600 W Peak Power Transient Voltage Suppressor, 2-Pin Surmetic(TM) 40, Pb-Free, Bulk Box. [40V TVS Diode (P6KE47A)]", Manufacturer="On Semiconductor", PartNumber=P6KE47AG, ComponentLink1Description="Manufacturer URL", ComponentLink1URL=http://www.onsemi.com/, ComponentLink2Description=Datasheet, ComponentLink2URL=http://www.onsemi.com/pub_link/Collateral/P6KE6.8A-D.PDF, ComponentLink3Description="Package Specification", ComponentLink3URL=http://www.onsemi.cn/pub_link/Collateral/017AA.PDF, DatasheetVersion="Rev. 10", Direction=Unidirectional, IR Max (uA)=5, Mounting Technology="Through Hole", PackageDescription="2-Pin, Axial Lead, Diameter 3.49 mm", PackageReference=SURMETIC40-2-017AA-01, PackageVersion="Rev. O, 09/2005", Packing="Bulk Box", PPK Max (W)=600, RoHS=Pb-Free, V(BR) Typ (V)=47.05
H1 H2 H3 H4 H5 H6 H7 H8 H9 H10 H11 H12 H13 H14 H15: "Hardware", Manufacturer_Name="Keystone Electronics", Mouser Part Number=534-5003, Allied Price/Stock=https://www.alliedelec.com/keystoneelectronics-5003/70799414/, Allied_Number=70799414, Datasheet Link=https://componentsearchengine.com/Datasheets/1/5003.pdf, Height=4.57mm, Manufacturer_Part_Number=5003, Mouser Price/Stock=https://www.mouser.com/Search/Refine.aspx?Keyword=534-5003
HS1: library part WV-DT2-101E_1, "Heat Sink TO-220, TO-247 (Dual) Aluminum 4.0W @ 40°C Board Level, Vertical"
IC1 IC2 IC3: "Integrated Circuit", Manufacturer_Name="Texas Instruments", Mouser Part Number=595-SN74LV1T34DBVRG4, Datasheet Link=http://www.ti.com/lit/gpn/sn74lv1t34, Height=1.45mm, Manufacturer_Part_Number=SN74LV1T34DBVRG4, Mouser Price/Stock=https://www.mouser.com/Search/Refine.aspx?Keyword=595-SN74LV1T34DBVRG4
IC4: "Integrated Circuit", Manufacturer_Name="Texas Instruments", Mouser Part Number=595-INA194AIDBVR, Datasheet Link=http://www.ti.com/lit/gpn/ina194, Height=1.45mm, Manufacturer_Part_Number=INA194AIDBVR, Mouser Price/Stock=https://www.mouser.com/Search/Refine.aspx?Keyword=595-INA194AIDBVR
IC5 IC6 IC7: "Integrated Circuit", Manufacturer_Name="Allegro Microsystems", Datasheet Link=https://www.allegromicro.com/~/media/Files/Datasheets/ACS725-Datasheet.ashx, Height=1.75mm, Manufacturer_Part_Number=ACS725LLCTR-20AB-T
J1: "Connector", Manufacturer_Name="Phoenix Contact", Mouser Part Number=651-1985917, RS Part Number=8552938, Allied Price/Stock=https://www.alliedelec.com/phoenixcontact-1985917/70353658/, Allied_Number=70353658, Datasheet Link=https://media.digikey.com/pdf/Data%20Sheets/Phoenix%20Contact%20PDFs/Multi-Postion%20PCTerminal%20Blocks.pdf, Height=13.95mm, Manufacturer_Part_Number=1985917, Mouser Price/Stock=https://www.mouser.com/Search/Refine.aspx?Keyword=651-1985917, RS Price/Stock=http://uk.rs-online.com/web/p/products/8552938
J2: "Connector", Manufacturer_Name="Phoenix Contact", Mouser Part Number=651-1733606, RS Part Number=8818799, Datasheet Link=https://www.phoenixcontact.com/online/portal/gb/?uri=pxc-oc-itemdetail:pid=1733606&library=gben&pcck=P-11-01-05&tab=1&selectedCategory=ALL, Height=15.3mm, Manufacturer_Part_Number=1733606, Mouser Price/Stock=https://www.mouser.com/Search/Refine.aspx?Keyword=651-1733606, RS Price/Stock=https://uk.rs-online.com/web/p/products/8818799
J3: "Connector", Manufacturer_Name="Phoenix Contact", Mouser Part Number=651-1985881, RS Part Number=4670338, Allied Price/Stock=https://www.alliedelec.com/phoenixcontact-1985881/70353630/, Allied_Number=70353630, Datasheet Link=https://www.phoenixcontact.com/online/portal/us?uri=pxc-oc-itemdetail:pid=1985881&library=usen&tab=1, Height=13.9mm, Manufacturer_Part_Number=1985881, Mouser Price/Stock=https://www.mouser.com/Search/Refine.aspx?Keyword=651-1985881, RS Price/Stock=http://uk.rs-online.com/web/p/products/4670338
J4: "Connector", Manufacturer_Name=Amphenol, Mouser2 Part Number=649-DILB8P223TLF, Datasheet Link=https://componentsearchengine.com/Datasheets/1/DILB8P-223TLF.pdf, Height=5.25mm, Manufacturer_Part_Number=DILB8P-223TLF, Mouser2 Price/Stock=https://www.mouser.com/Search/Refine.aspx?Keyword=649-DILB8P223TLF
J5: "2-Port Connector", Manufacturer_Name="Phoenix Contact", Mouser Part Number=651-1985881, RS Part Number=4670338, Allied Price/Stock=https://www.alliedelec.com/phoenixcontact-1985881/70353630/, Allied_Number=70353630, Datasheet Link=https://www.phoenixcontact.com/online/portal/us?uri=pxc-oc-itemdetail:pid=1985881&library=usen&tab=1, Height=13.9mm, Manufacturer_Part_Number=1985881, Mouser Price/Stock=https://www.mouser.com/Search/Refine.aspx?Keyword=651-1985881, RS Price/Stock=http://uk.rs-online.com/web/p/products/4670338
J6: "Connector", Manufacturer_Name="Phoenix Contact", Mouser Part Number=651-1730515, Allied Price/Stock=https://www.alliedelec.com/phoenixcontact-1730515/71065041/, Allied_Number=71065041, Datasheet Link=https://media.digikey.com/PDF/Data%20Sheets/Phoenix%20Contact%20PDFs/1730515.pdf, Height=18mm, Manufacturer_Part_Number=1730515, Mouser Price/Stock=https://www.mouser.com/Search/Refine.aspx?Keyword=651-1730515
PS1: "Power Supply", Manufacturer_Name="RECOM Power", Mouser Part Number=919-RS3-243.3S, RS Part Number=0163748P, Datasheet Link=https://www.arrow.com/en/products/rs3-243.3s/recom-power, Height=11.35mm, Manufacturer_Part_Number=RS3-243.3S, Mouser Price/Stock=https://www.mouser.com/Search/Refine.aspx?Keyword=919-RS3-243.3S, RS Price/Stock=http://uk.rs-online.com/web/p/products/0163748P
PS2: "Power Supply", Manufacturer_Name="RECOM Power", Mouser Part Number=919-RS3-2415S, Datasheet Link=https://www.recom-power.com/pdf/Econoline/RS3-S_D_Z.pdf, Height=11.35mm, Manufacturer_Part_Number=RS3-2415S, Mouser Price/Stock=https://www.mouser.com/Search/Refine.aspx?Keyword=919-RS3-2415S
R1 R3 R4 R5 R6 R7 R8 R9 R10 R11 R13 R14 R15: "Resistor", LatestRevisionDate=17-Jul-2002, LatestRevisionNote="Re-released for DXP Platform.", PackageDescription="Axial Device, Thru-Hole; 2 Leads; 0.3 in Pin Spacing", PackageReference=AXIAL-0.3, Published=8-Jun-2000, Publisher="Altium Limited"
R2: library part CRE2512-FZ-R005E-3, "5mOhm Sensing Resistor CRE2512-FZ-R005E-3", Manufacturer_Name=Bourns, Mouser Part Number=652-CRE2512FZR005E-3, RS Part Number=1825562P, Allied Price/Stock=https://www.alliedelec.com/bourns-cre2512-fz-r005e-3/70418758/, Allied_Number=70418758, Datasheet Link=https://www.mouser.com/datasheet/2/54/re-1388683.pdf, Height=0.7mm, Manufacturer_Part_Number=CRE2512-FZ-R005E-3, Mouser Price/Stock=https://www.mouser.com/Search/Refine.aspx?Keyword=652-CRE2512FZR005E-3, RS Price/Stock=http://uk.rs-online.com/web/p/products/1825562P
R12: "Resistor", Manufacturer_Name=Vishay, Mouser Part Number=71-WSHP2818R0500FEA, Datasheet Link=https://www.vishay.com/docs/30347/wshp2818.pdf, Height=1.75mm, Manufacturer_Part_Number=WSHP2818R0500FEA, Mouser Price/Stock=https://www.mouser.com/Search/Refine.aspx?Keyword=71-WSHP2818R0500FEA
RV1: "Varistor", Manufacturer_Name=LITTELFUSE, Datasheet Link=http://www.littelfuse.com/~/media/electronics/datasheets/varistors/littelfuse_varistor_za_datasheet.pdf.pdf, Height=20mm, Manufacturer_Part_Number=V68ZS10P
U1: "F280049C", Parameter 1="test 2"
U2: "Undefined or Miscellaneous", Manufacturer_Name=EPCOS, Mouser Part Number=871-B65878E1012D001, RS Part Number=1253423, Datasheet Link=http://www.mouser.com/datasheet/2/400/pq_26_25-1280911.pdf, Height=29.3mm, Manufacturer_Part_Number=B65878E1012D001, Mouser Price/Stock=https://www.mouser.com/Search/Refine.aspx?Keyword=871-B65878E1012D001, RS Price/Stock=http://uk.rs-online.com/web/p/products/1253423
U3: "Fuse holder", Manufacturer_Name=LITTELFUSE, Mouser Part Number=576-0PTF0078P, RS Part Number=1740656, Datasheet Link=https://media.digikey.com/pdf/Data%20Sheets/Littelfuse%20PDFs/PTF075_77_78.pdf, Height=11.5mm, Manufacturer_Part_Number=0PTF0078P, Mouser Price/Stock=https://www.mouser.com/Search/Refine.aspx?Keyword=576-0PTF0078P, RS Price/Stock=http://uk.rs-online.com/web/p/products/1740656

## Free pads (board coordinates)
  round 60 hole 167 unplated: M1(175,175) M2(175,4825) M3(5825,4825) M4(5800,175)

## Via types
v1: diameter 50, hole 28, Top Layer to Bottom Layer, 33 vias

## Nets (pads, with @x,y where several pads share a name; then routed paths per layer and width w, separated by ;. In a path a pad name is that pad's centre, name@x,y a point inside that pad or via, vN(x,y) a via of type N, cw(c..) or ccw(c..) an arc to the next point about the centre after c; other vN are vias at no path point)
3.3V: C1.1 C2.1 C3.1 C4.1 C5.1 C7.1 C9.1 C32.1 C36.1 C45.1 H12.1 IC1.5 IC2.5 IC3.5 IC4.5 IC5.8 IC6.8 IC7.8 J1.3 PS1.6 R13.2 U1.1 U1.41 | length 4498.7
  Top Layer w10: U1.41 3349.06,2315 C4.1@3390,2274.06 ; C4.1 3390.31,2271.3 3428.19,2271.3 C5.1 ; C3.1 5696.3,2390.47 5696.3,2428.35 C2.1 5698.11,2728.11 C1.1 ; C3.1@5699.06,2390.16 5713.7,2375.51 5713.7,2331.3 U1.1
  Top Layer w20: H12.1@105,1304.53 950.52,1304.53 1210,1045.04 PS1.6 ; IC4.5 2391.02,1647.4 2392.83,1649.21 2392.83,1692.83 2465,1765 C9.1 ; v1(3265,4020) 3320,4020 C36.1 3343.94,4040 3349.29,4034.65 3349.29,3975.71 3395,3930 3463.44,3930 3475.16,3941.72 3475.16,3943.19 3476.97,3945 IC6.8 ; v1(3270,3720) 3282.5,3732.5 3347.5,3732.5 C45.1 3350,3670 3400,3620 3463.44,3620 3475.16,3631.72 3475.16,3643.19 3476.97,3645 IC7.8 ; v1(3270,4310) 3325,4310 C32.1 3338.94,4320 3344.29,4314.65 3344.29,4255.71 3385,4215 3461.97,4215 3476.97,4230 IC5.8
  PWR w20: v1@3260,3720 v1(3270,3720) ; v1@3260,4020 v1(3265,4020)
  Bottom Layer w20: IC1.5 3917.4,816.02 4046.38,945 4236.96,945 ; IC2.5 4114.21,806.02 4114.21,822.25 4236.96,945 ; IC3.5 4312.4,816.02 4314.21,817.83 4326.02,817.83 v1@4453.19,945 ; v1(4475,945) v1@4453.19,945 ; C7.1 5550,1520 J1.3 ; 4236.96,945 v1@4453.19,945
15V: C17.1 C18.1 C19.1 C28.1 C29.1 C30.1 C31.1 H13.1 J4.5 PS2.6 R4.2 U4.1 U4.10 U4.14 U4.18 | length 8488.9
  Top Layer w7: R4.2@580,4257.5 R4.2 ; J4.5@730,4098.43 J4.5 J4.5@730,4107.5
  Top Layer w20: H13.1@125,1120 308.96,1120 393.96,1035 PS2.6
  PWR w20: C17.1 C17.1@240.63,4264.37 ; R4.2@579.37,4264.37 R4.2
  Bottom Layer w30: C17.1 C17.1@241.26,4265 ; C19.1 365,3835 365,2827.36 460,2732.36 460,1175 PS2.6 ; R4.2@580,4257.5 R4.2 ; J4.5@730,4098.43 J4.5 J4.5@730,4107.5
  Bottom Layer w50: PS2.6 801.26,1035 1060,1293.74 1060,1600 1617.09,2157.09 2010,2550 3132.29,2550 3416.03,2833.74 C28.1 4477.68,2833.74 C28.1@4478.94,2835 ; U4.1@5087.29,3062.75 U4.1
24ADC: C23.2 D7.1 H10.1 R9.1 R10.2 U1.67 | length 979.7
  Bottom Layer w20: H10.1@1870,1800 1870,1875 R9.1 R10.2 2020,1930.39 2088.77,1999.16 2088.77,2022.91 2102.39,2036.54 2166.34,2036.54 ; D7.1 2462.44,2047.44 U1.67
24V: C20.1 C21.2 C22.1 C24.1 C25.1 C26.1 C27.1 D6.1 H9.1 IC4.3 PS1.2 PS2.2 R2.1 R9.2 U3.2 | length 1755.1
  Top Layer w20: C26.1 C27.1 546.04,757.11 546.04,712.65 590.83,667.86 590.83,644.17 PS2.2 ; C24.1@931.79,664.45 C24.1 935,669.45 935,878.15 C25.1 945.21,877.94 962.62,877.94 PS1.2@1205.56,635 ; R2.1@2112.95,1457.4 2144.29,1488.74 2185.12,1488.74 2268.98,1572.6 IC4.3
  Bottom Layer w20: D6.1 818.84,345 C21.2
  other v1: 1775,1960 1775,2060 1775,2160
24VIN: J5.2 U3.1
48ADC: C16.2 D5.1 H5.1 R5.1 R7.2 U1.68 | length 1104.3
  Top Layer w10: H5.1 2528.28,2808.28 2528.28,2848.28 R5.1 2537.5,2852.5 2627.5,2852.5 2630,2850 2636.72,2843.28 2677.19,2843.28 2761.54,2758.94 C16.2 2768.07,2748.46 2768.07,2682.13 2770.2,2680 2765.94,2680 2761.57,2675.63 2761.57,2671.37 2580,2489.8 2580,2265 U1.68
48V: C11.1 C12.1 C13.1 C14.1 C15.1 C42.1 C43.1 C44.1 D1.1 D3.1 H4.1 HS1.2 J3.1 R5.2 RV1.1 U4.27 | length 776.8
  Top Layer w7: HS1.2@1058.39,3414.73 HS1.2
  Top Layer w20: C12.1 944.25,3174.72 D1.1
  Bottom Layer w20: C43.1@4037.63,4660 C43.1
  Bottom Layer w50: C44.1 3736.68,4710 3824.2,4622.48 3838.41,4622.48 3838.74,4622.48 3860.03,4643.77 3978.77,4643.77 3995,4660 C43.1@4037.63,4660 ; U4.27@3844.67,4625 3865.95,4646.29 3866.29,4646.29 U4.27@3867.52,4647.52
AADC: IC7.7 U1.69 | length 2222.4
  Top Layer w10: U1.69 2530,2115 2640,2115 2680,2155 2680,2475 v1(3410,3205)
  Top Layer w20: v1(3415,3670) 3423.12,3670 3446.31,3693.19 3497.8,3693.19 IC7.7
  Bottom Layer w10: v1(3410,3205) 3412.5,3207.5 3412.5,3667.5 v1(3415,3670)
ABH: C40.1 C41.1 D10.1 U4.11 | length 623.3
  Top Layer w20: U4.11@5081.26,3859.65 5095.04,3859.65 5138.66,3816.02 5217.13,3816.02 C41.1 5225,3813.15 5333.15,3705 D10.1 5412.5,3732.5 5412.5,3733.45 C40.1
ABL: C40.2 C41.2 D10.2 U4.12 | length 614.1
  Top Layer w20: U4.12@5081.26,3940.35 5150.35,3940.35 C41.2 5225,4010 5315,4100 D10.2 5536.67,3948.33 5561.67,3948.33 C40.2
AHIGH: U1.76 U4.9 | length 4672.8
  Top Layer w10: v1(3365,925) 3375,925 3650,1200 v1(3650,2900)
  Bottom Layer w10: U1.76 2830,785 2970,925 v1(3365,925) ; v1(3650,2900) 4300,2900 4650,3250 4650,3615 4725,3690 U4.9@4919.84,3690
ALOW: U1.75 U4.3 | length 3996.1
  Top Layer w10: v1(3050,1125) 3050,1400 3425,1775 v1(3425,2045) ; v1(4200,2675) 4725,3200 U4.3@5081.26,3200
  Bottom Layer w10: U1.75 2730,1050 2800,1120 3045,1120 v1(3050,1125) ; v1(3425,2045) 3570,2045 v1(4200,2675)
APOS: H2.1 IC1.4 U1.53 | length 2451.1
  Bottom Layer w10: U1.53 2535,510 2556.64,510 2611.64,565 3242.24,565 3252.93,575.68 ccw(c3230,615) 3269.32,592.07 3481.45,804.21 IC1.4 ; U1.53@2557.68,511.05 2948.73,120 H2.1
BADC: IC6.7 U1.23 | length 3421.9
  Top Layer w10: v1(3470,3155) 3560,3155 4250,2465 5355,2465 5480,2340 5480,2265 U1.23
  Top Layer w20: v1(3420,3975) 3428.12,3975 3446.31,3993.19 3497.8,3993.19 IC6.7
  Bottom Layer w10: v1(3420,3975) 3470,3925 v1(3470,3155)
BBH: C38.1 C39.1 D9.1 U4.15 | length 842.6
  Top Layer w20: U4.15@5081.26,4209.65 5158.5,4209.65 C39.1 5216.85,4155 5475,4155 D9.1 5642.94,4060 5755,4172.06 C38.1
BBL: C38.2 C39.2 D9.2 U4.16 | length 841.1
  Top Layer w20: U4.16@5081.26,4290.35 5155.35,4290.35 C39.2 5475,4350 5570,4445 D9.2 5632.58,4455 5755,4332.58 C38.2
BHIGH: U1.36 U4.13 | length 5965.2
  Top Layer w10: v1(3600,1250) v1(3600,2950)
  Bottom Layer w10: v1(3600,1250) 4450,1250 4900,800 5285,800 5330,755 U1.36 ; v1(3600,2950) 4300,2950 4600,3250 4600,3965 4675,4040 U4.13@4919.84,4040
BLOW: U1.35 U4.4 | length 2894.6
  Top Layer w10: U1.35 5230,790 5135,885 5135,1785 v1(5275,1925)
  Bottom Layer w10: U4.4@5081.26,3270 5180,3270 5280,3170 5280,1930 v1(5275,1925)
BPOS: IC2.4 U1.52 | length 1783.4
  Top Layer w10: U1.52 2495,450 3275,450 3530,705 3875,705 3970,800 v1(3977.5,800)
  Bottom Layer w7: v1(3977.5,800) 4028.19,800 4035,806.81 IC2.4
CADC: IC5.7 U1.63 | length 2398.2
  Top Layer w10: U1.63 3080,2265 3080,2645 v1(3530,3095)
  Top Layer w20: v1(3411.09,4260) 3413.12,4260 3433.12,4280 IC5.7
  Bottom Layer w10: v1(3411.09,4260) 3411.09,4253.91 3530,4135 v1(3530,3095)
CBH: C34.1 C35.1 D8.1 U4.19 | length 616.3
  Top Layer w20: U4.19@5081.26,4559.65 5173.5,4559.65 C35.1 5215,4515 5330,4400 5370,4400 D8.1 5539.33,4569.33 5544.33,4569.33 C34.1
CBL: C34.2 C35.2 D8.2 U4.20 | length 610.7
  Top Layer w20: U4.20@5081.26,4640.35 5140.35,4640.35 C35.2 5305,4805 D8.2 5384.53,4805 5550.47,4639.06 C34.2
CHIGH: U1.78 U4.17 | length 5049.8
  Top Layer w10: U1.78 3030,780 3550,1300 v1(3550,3000)
  Bottom Layer w10: v1(3550,3000) 4275,3000 4550,3275 4550,4135 4805,4390 U4.17@4919.84,4390
CLOW: U1.77 U4.5 | length 3918.5
  Top Layer w10: U1.77 2930,1665 3330,2065 v1(3330,2105) ; v1(4125,2750) 4205,2750 4795,3340 U4.5@5081.26,3340
  Bottom Layer w10: v1(3330,2105) 3480,2105 v1(4125,2750)
CPOS: IC3.4 U1.10 | length 1758.3
  Top Layer w10: v1(4235.88,872.16) 4235.88,1695.88 4820.32,2280.32 4820.32,2305.32 U1.10
  Bottom Layer w7: v1(4235.88,872.16) 4235.88,807.69 4235,806.81 IC3.4
EPWM: H6.1 J4.1 U1.80 | length 5383.9
  Top Layer w10: H6.1@185,3910 320,3910 J4.1 475,3845 564.14,3845 570,3839.14 570,2315 2160,725 2160,719.25 2302.47,576.78 ccw(c2355.63,629.95) 2317.76,565 2320.56,565 3180,565 U1.80
FAULT: C48.1 R14.1 U1.64 | length 3764.5
  Top Layer w10: v1(4425,2525) 5320,2525 5430,2635 5430,2880 5755,3205 R14.1@5755,3287.5 ; 5757.5,3287.5 5852.5,3287.5 C48.1 ; R14.1@5760,3277.5 5760,3280 R14.1@5762.5,3277.5
  Bottom Layer w10: U1.64 3170,1975 3875,1975 v1(4425,2525)
GND: C1.2 C2.2 C3.2 C4.2 C5.2 C6.2 C7.2 C8.2 C9.2 C11.2 C12.2 C13.2 C14.2 C15.2 C16.1 C17.2 C18.2 C19.2 C20.2 C21.1 C22.2 C23.1 C24.2 C25.2 C26.2 C27.2 C28.2 C29.2 C30.2 C31.2 C32.2 C33.2 C36.2 C37.2 C42.2 C43.2 C44.2 C45.2 C46.2 C47.2 C48.2 C49.2 C50.2 D3.2 D4.2 D5.2 D6.2 D7.2 D11.2 H8.1 H11.1 HS1.6 HS1.7 HS1.8 HS1.9 HS1.10 IC1.3 IC2.3 IC3.3 IC4.2 IC5.5 IC6.5 IC7.5 J1.1 J2.5 J3.2 J4.3 J5.1 PS1.1 PS1.7 PS2.1 PS2.7 R7.1 R10.1 R12.2 RV1.2 U1.20 U1.22 U1.60 U1.62 U4.2 | length 3876.4
  Top Layer w7: HS1.6 HS1.6@1084.29,4215.32 ; HS1.9@1234.61,4065 HS1.9 ; C32.2@3330.12,4380 C32.2 ; C36.2@3330.82,4094.06 3331.88,4095.12 C36.2 ; C45.2@3349.88,3790 C45.2
  Top Layer w10: D5.2 2828.01,2680.45 2828.01,2754.55 C16.1 2828.46,2758.94 2912.81,2843.28 2923.28,2843.28 R7.1@2930,2850 ; U1.62 3180.51,2164.49 3305.09,2164.49 C4.2@3382.53,2241.93 ; C4.2@3390,2240.98 3394.09,2236.89 C5.2 ; C1.2 5621.57,2603.43 5665,2560 5665,2433.27 C2.2 5663.92,2428.13 5667.97,2424.07 5670,2422.05 C3.2 5670,2344.33 5680,2334.33 5680,2290 5639.68,2249.68 5639.68,2224.68 U1.22
  Top Layer w20: D4.2 1001.02,4546.45 1019.57,4565 HS1.10 ; C8.2 IC4.2 ; v1(3265,4090) 3269.06,4094.06 C36.2@3330.82,4094.06 ; v1(3270,3790) C45.2@3349.88,3790 ; v1(3270,4380) C32.2@3330.12,4380 ; C32.2 3338.48,4378.6 3401.52,4378.6 C33.2 3474.88,4382.09 3476.97,4380 IC5.5 ; C36.2 3341.71,4096.83 3408.29,4096.83 C37.2 3473.43,4098.54 3476.97,4095 IC6.5 ; C45.2 3351.71,3791.83 3413.29,3791.83 C46.2 3415.73,3794.27 3498.88,3794.27 IC7.5 ; D11.2 5795,3480 5848.91,3426.09 5848.91,3391.09 C48.2
  Bottom Layer w7: v1(3744.47,760.53) 3750,755 3810.12,755 ; IC1.3 3842.6,717.6 3810.12,750.08 3810.12,755 ; IC2.3 4037.6,717.6 4005.12,750.08 4005.12,755 ; IC3.3 4237.6,715.62 4229.29,723.93 4219.46,723.93 4188.39,755 4005.12,755 ; 3810.12,755 4005.12,755
  Bottom Layer w20: C21.1 1101.16,345 D6.2 ; R10.1 2087.91,2157.09 2087.91,2117.09 2101.54,2103.46 C23.1 2105.45,2103.01 2174.55,2103.01 D7.2
  Bottom Layer w50: R12.2@4105,3496.54 C47.2 4418.46,3496.54 v1(4435,3480)
IADC: C8.1 H3.1 R3.2 U1.66 | length 1262.3
  Top Layer w20: H3.1@1905,1605 2070,1605 C8.1 2168.91,1716.09 2168.91,1741.09 R3.2
  Bottom Layer w10: R3.2 2270,2000 2505,2000 2720,2215 U1.66
NetC10_1: C10.1 D2.1 J4.8 | length 658.7
  Top Layer w20: J4.8 460,4130 D2.1
  Bottom Layer w20: D2.1 620.38,4325 644,4348.62 809.8,4348.62 C10.1
NetC10_2: C10.2 D1.2 D4.1 HS1.3 HS1.5 J4.6 U2.7 U2.8 U2.9 U2.10 U2.11 U2.12 | length 3759.7
  Top Layer w20: J4.6 755,4225 C10.2 ; D4.1 878.98,4543.03 755,4419.06 C10.2 ; HS1.3 1068.9,3172.13 D1.2 ; HS1.5 1016.14,4261.38 835.36,4261.38 791.73,4305 C10.2
  Top Layer w80: U2.12@1740,4110 U2.12
  Top Layer w100: HS1.5 1534.76,4315.24 U2.12@1740,4110
  Top Layer w125: U2.12 U2.11 U2.10 U2.9 U2.8 U2.7
  Bottom Layer w20: HS1.3 1121.4,3377.74 1121.4,4237.07 1078.61,4279.85 1078.61,4306.63 HS1.5
NetC33_1: C33.1 IC5.6 | length 96.7
  Top Layer w20: C33.1 3471.97,4325 3476.97,4330 IC5.6
NetC37_1: C37.1 IC6.6 | length 91.1
  Top Layer w20: C37.1 3473.43,4041.46 3476.97,4045 IC6.6
NetC46_1: C46.1 IC7.6 | length 88.1
  Top Layer w20: C46.1 3468.43,3736.46 3476.97,3745 IC7.6
NetC47_1: C47.1 R11.1 U4.8 | length 853.4
  Top Layer w20: v1@4412.5,3557.5 5082.54,3557.5 U4.8
  Bottom Layer w50: R11.1 4250.77,3564.23 4344.23,3564.23 C47.1 4423.46,3563.46 v1(4425,3565)
NetC49_1: C49.1 R13.1 R14.2 U4.6 | length 566
  Top Layer w20: U4.6@5081.26,3410 5260,3410 R13.1 5389.5,3290 5404.15,3275.35 5430.14,3275.35 5438.78,3266.72 R14.2@5452.22,3266.72 ; R14.2 5461.72,3266.72 5461.72,3291.72 5498.66,3328.66 5498.66,3351.16 C49.1@5505,3357.5 ; C49.1 C49.1@5503.15,3377.5
NetD2_2: D2.2 R4.1 | length 364.8
  Top Layer w20: D2.2 460,4685 R4.1
NetH14_1: H14.1 IC7.1 IC7.2 U4.24 | length 468.2
  Top Layer w20: H14.1 3660,3495.89 3676.05,3511.94 3676.05,3643.19 3677.86,3645 3750.95,3645 U4.24@3800.08,3694.13 ; IC7.2 U4.24@3800.08,3695 ; U4.24@3796.02,3698.19 U4.24@3802.04,3704.22 ; U4.24@3806.34,3697.52 3817.52,3697.52 U4.24
NetHS1_1: HS1.1 R6.2 | length 357.5
  Top Layer w20: R6.2 845,3749.13 HS1.1
NetHS1_4: HS1.4 R8.1 | length 111
  Top Layer w7: R8.1 962.58,4417.42 1066.32,4417.42 HS1.4
NetIC1_2: IC1.2 J2.2 | length 320.8
  Bottom Layer w20: J2.2 IC1.2
NetIC2_2: IC2.2 J2.3 | length 321.6
  Bottom Layer w20: IC2.2 4075.93,704.86 4075.93,385.93 J2.3
NetIC3_2: IC3.2 J2.4 | length 321.3
  Bottom Layer w20: J2.4 4274.35,385.65 4274.35,705.14 IC3.2
NetIC4_1: IC4.1 R3.1 | length 217.8
  Top Layer w20: IC4.1 2280.79,1710.79 R3.1
NetIC4_4: IC4.4 R2.2 U2.1 U2.2 U2.3 U2.4 U2.5 U2.6 | length 93
  Top Layer w20: R2.2@2379.21,1479.57 IC4.4
NetIC5_1: IC5.1 IC5.2 U4.26 | length 322.3
  Top Layer w20: IC5.1 3735.95,4230 3785.08,4279.13 U4.26@3828.43,4322.48 ; IC5.2 3703.58,4283.19 3781.02,4283.19 3820.31,4322.48 U4.26@3828.43,4322.48 ; U4.26@3838.74,4322.48 U4.26@3828.43,4322.48
NetIC5_3: IC5.3 IC5.4 J6.5 J6.6 | length 942.1
  Top Layer w20: J6.5@3185,4540 3295,4430 3650.39,4430 3676.05,4404.34 3676.05,4381.81 3677.86,4380 IC5.4 ; J6.5 J6.6
  Top Layer w50: IC5.3 IC5.4
NetIC6_1: IC6.1 IC6.2 U4.25 | length 315.3
  Top Layer w20: IC6.1 3750.95,3945 U4.25@3800.08,3994.13 ; IC6.2 U4.25@3796.02,3995 ; U4.25@3802.28,3997.52 3824.6,4019.84 U4.25@3839.84,4019.84 ; U4.25@3802.28,4000.71 3826.57,4025 3834.69,4025 U4.25
NetIC6_3: IC6.3 IC6.4 J6.3 J6.4 | length 1378.3
  Top Layer w20: J6.3 J6.4 ; J6.3@2990,4553.31 2990,4330 3175,4145 3627.76,4145 3677.76,4095 IC6.4
  Top Layer w50: IC6.3 IC6.4
NetIC7_3: IC7.3 IC7.4 J6.1 J6.2 | length 1650.3
  Top Layer w20: J6.2 J6.1 2793.6,4541.4 2793.6,4401.4 3305,3890 3570,3890 3663.19,3796.81 3698.58,3796.81 IC7.4
  Top Layer w50: IC7.3 IC7.4
NetJ1_2: J1.2 R1.2 | length 450
  Bottom Layer w20: R1.2 J1.2
NetJ4_4: J4.4 R8.2 | length 712.4
  Top Layer w20: R8.2 660,4245 583.5,4168.5 583.5,4033.25 730,3886.75 J4.4
NetJ4_7: J4.7 R6.1 | length 355.3
  Bottom Layer w20: J4.7 573.62,4143.62 791.38,4143.62 R6.1
NetR11_2: R11.2 R12.1 U4.21 U4.22 U4.23 | length 3.5
  Top Layer w7: U4.22 U4.22@3847.5,3265.02
NetR15_1: R15.1 U4.7 | length 100.8